# EAGLE board Mk4 Prototype (EAGLE 9.0.1), part 1 of 3
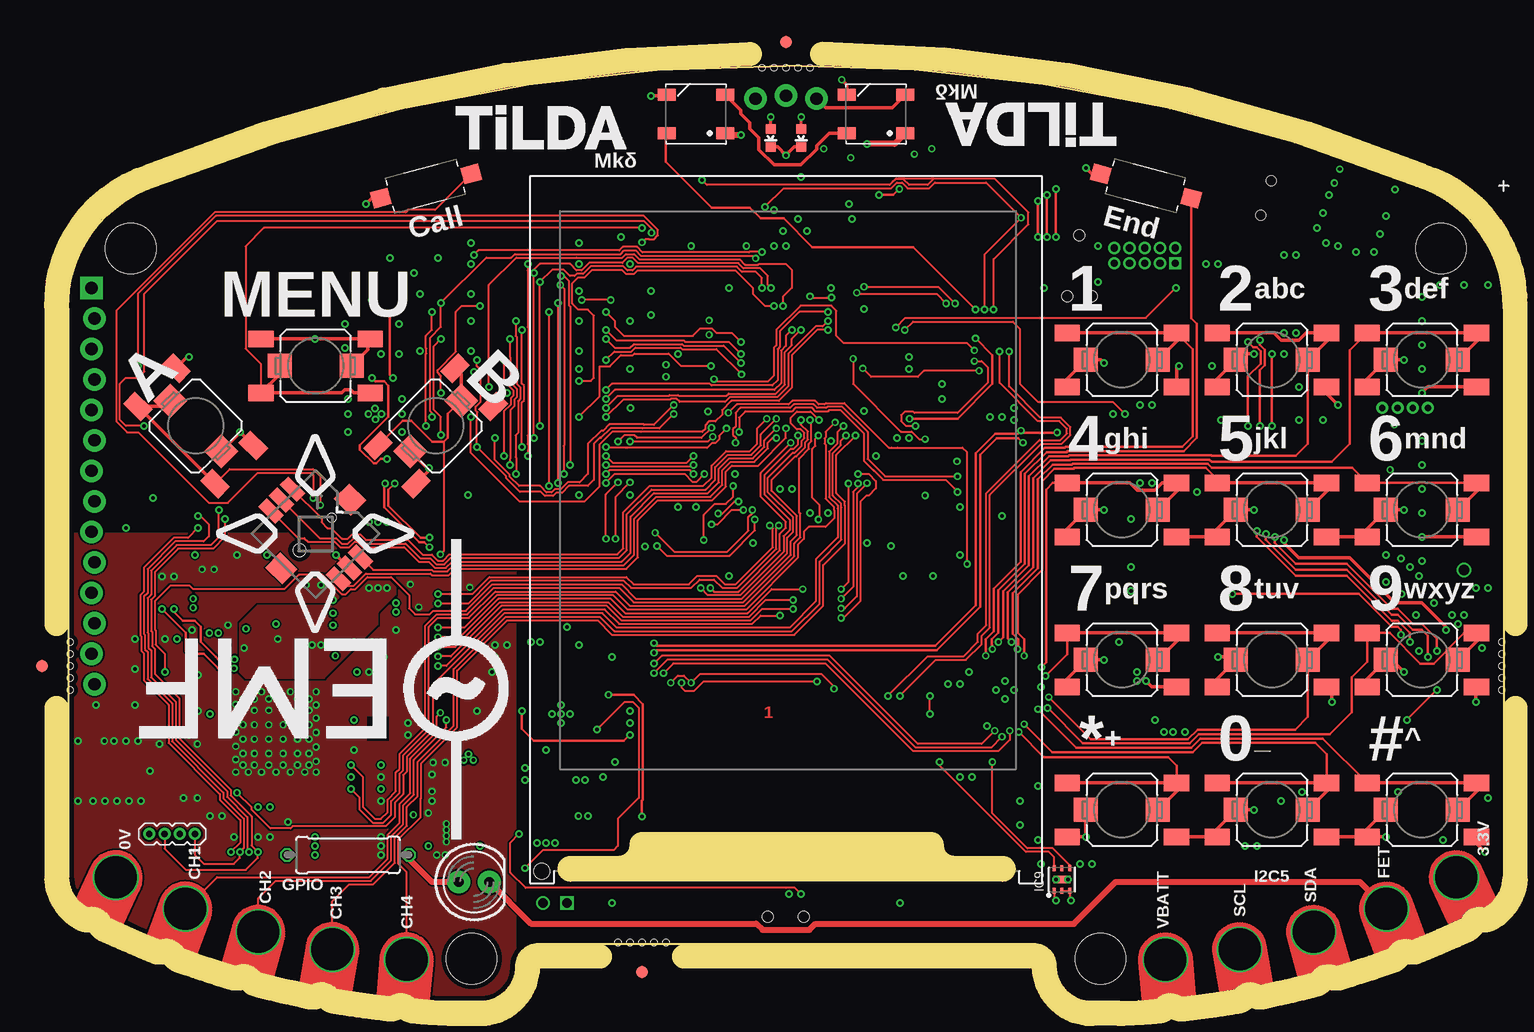
[diagram p0: board, top side]
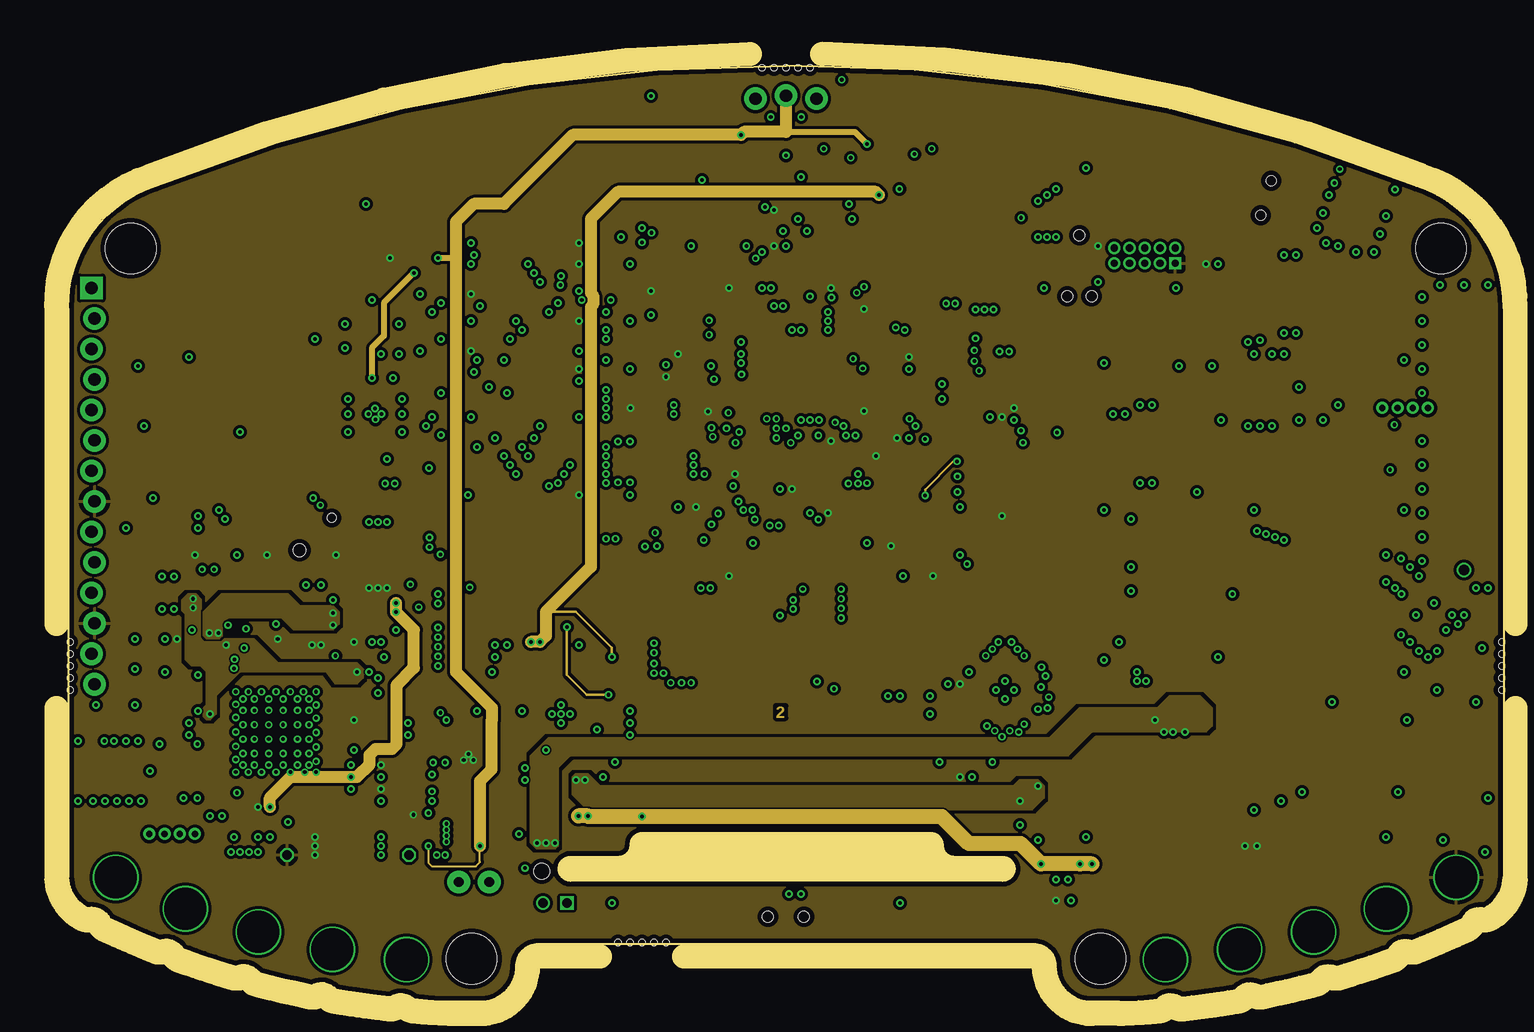
[diagram p1: board, inner layer 3V3@2]
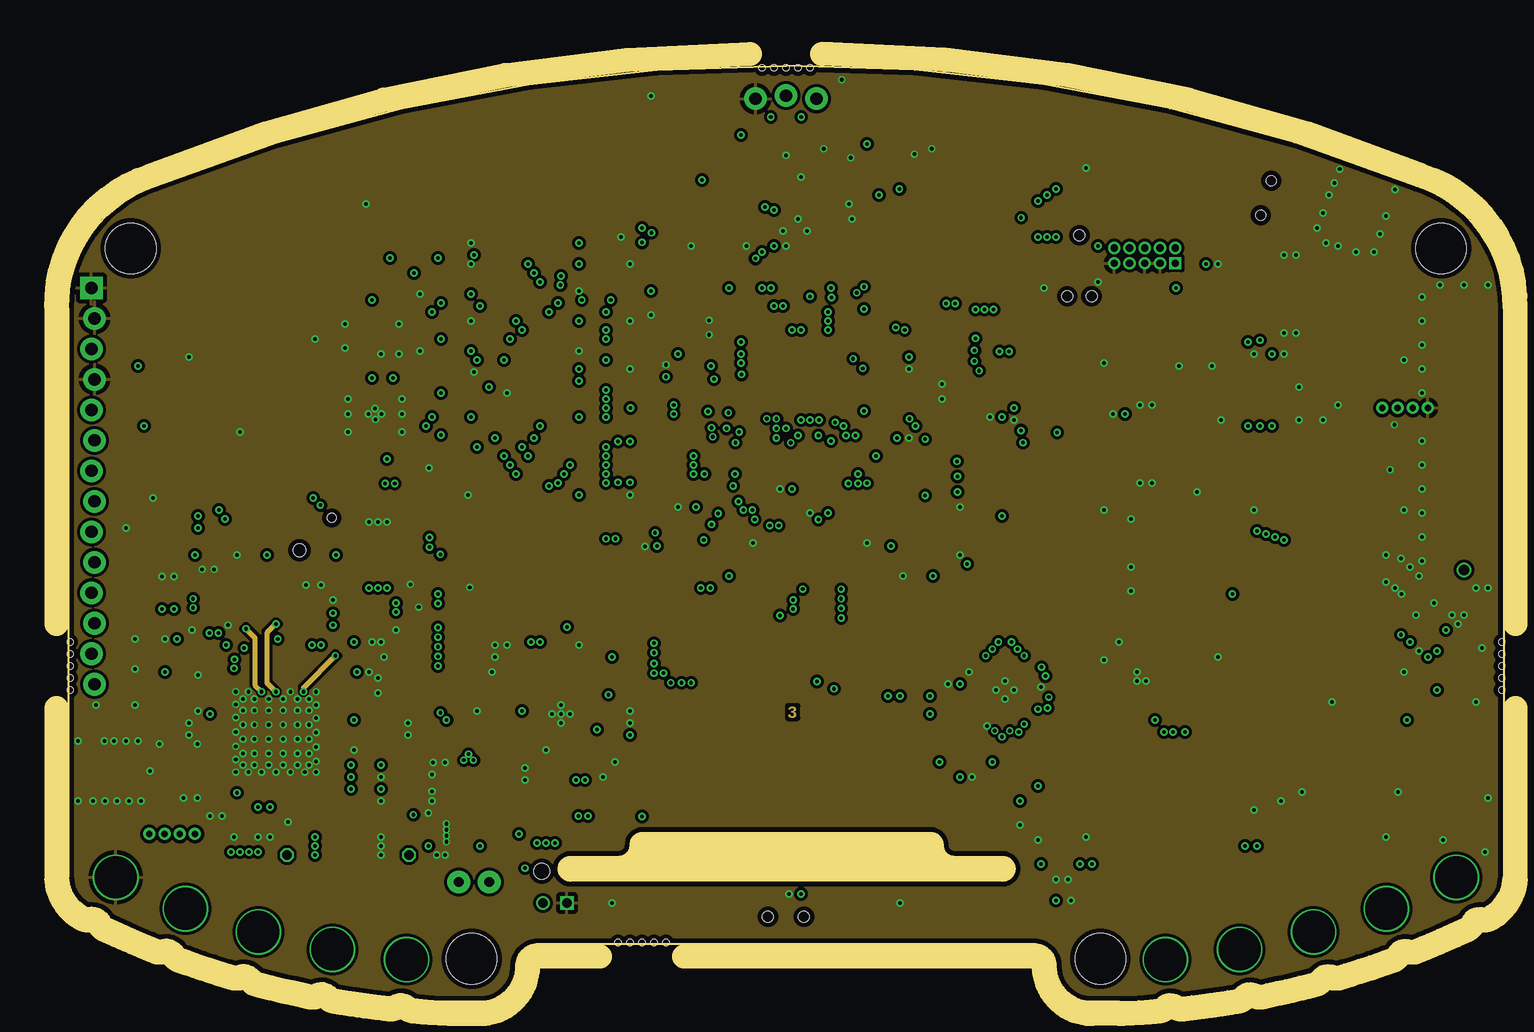
[diagram p2: board, inner layer GND@3]
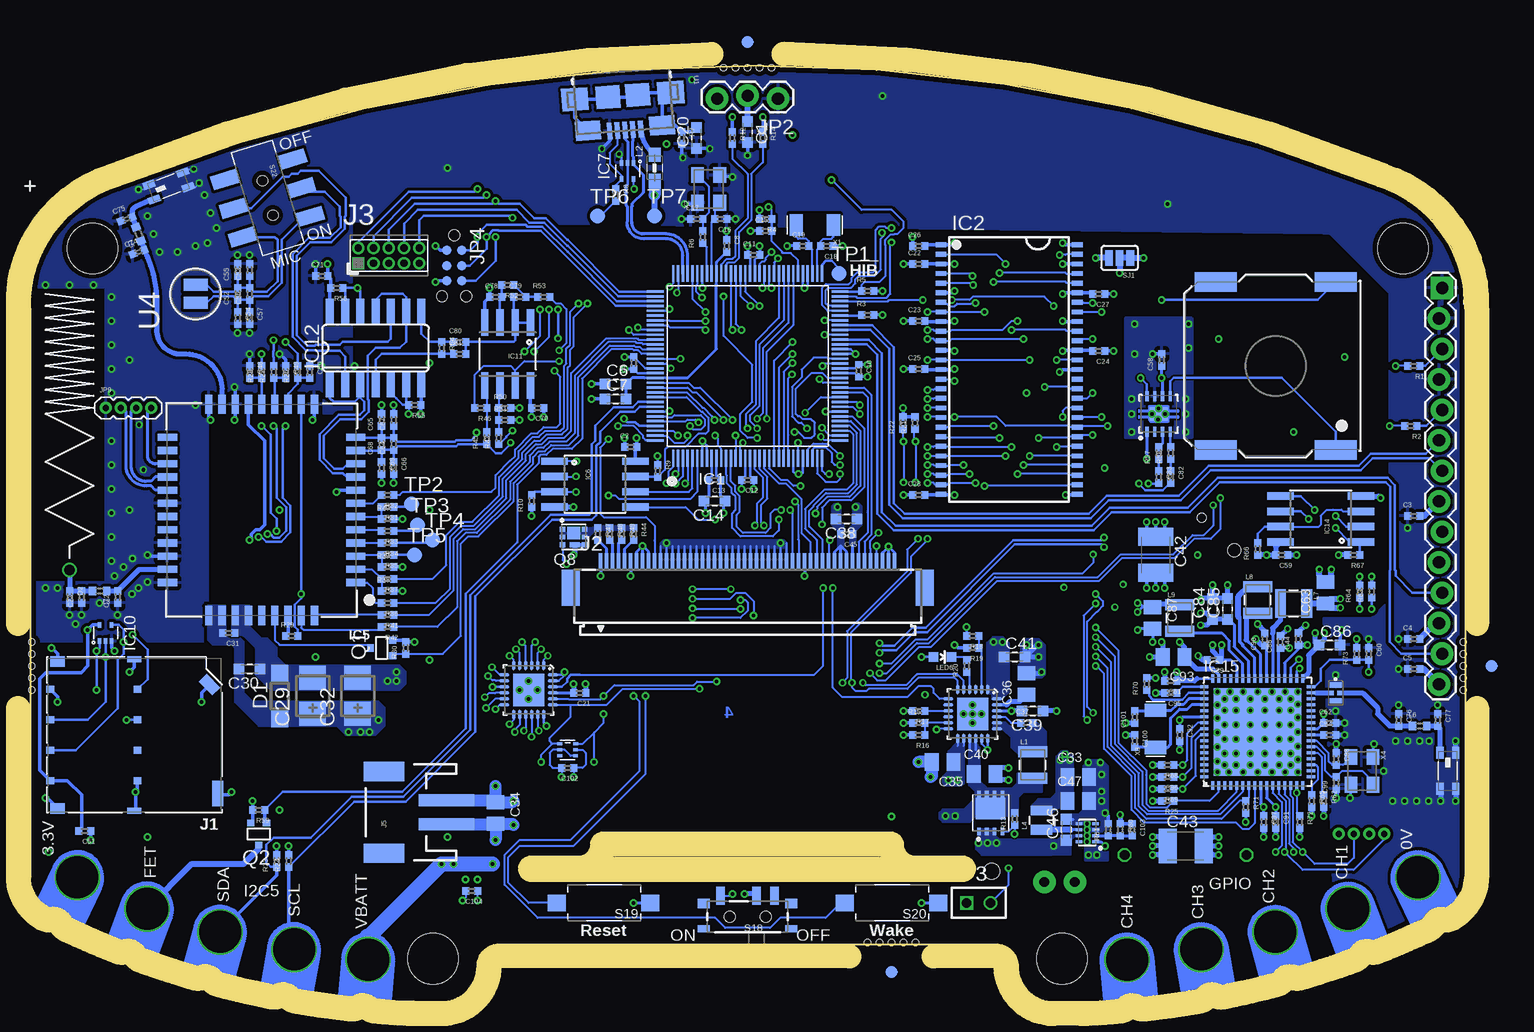
[diagram p3: board, bottom side, seen from below]

Size 119.6 x 78 mm. Coordinates in mm from the lower left corner, seen from the top.
Copper layers (1+2*15+16): Top 0.035mm / dielectric 0.22mm / 3V3@2 0.017mm / dielectric 1mm / GND@3 0.017mm / dielectric 0.22mm / Bottom 0.035mm
Design rules "little015mm  Round 4layer Newbury *": minimum track width 0.15mm, minimum drill 0.3mm, track to track 0.15mm, track to pad 0.15mm, pad to pad 0.15mm, via to via 0.15mm, smd to smd 0.15mm, copper to edge 0.4mm, drill to drill 0.3mm, minimum pad ring 0.15mm, minimum via ring 0.15mm, stop-mask expansion 0.1mm, vias tented up to drill 0.6mm, thermal gap 14mil
Net classes: 1 50R Single: width 0.4 mm, clearance 0.4 mm to class 0, clearance 0.4 mm; 2 90R Diff: width 0.25 mm, clearance 0.25 mm to class 0, clearance 0.4 mm to class 1, clearance 0.15 mm; 3 100R Diff: width 0.22 mm, clearance 0.25 mm to class 0, clearance 0.4 mm to class 1, clearance 0.25 mm to class 2, clearance 0.15 mm; 4 Audio: width 0.2 mm, clearance 0.25 mm to class 0, clearance 0.4 mm to class 1, clearance 0.25 mm to class 2, clearance 0.25 mm to class 3, clearance 0.15 mm
bRestrict: area 10.9,29.4 to 11.5,30.1

## Footprints (pad centres in the part's own frame; a part is rotated, then mirrored left to right if it is on the bottom)
2450AT18D0100 = smd 1 x 0.6: 1 -1.5,-0.65; 2 1.5,-0.65; 3 1.5,0.65; 4 -1.5,0.65
C0603K-SMALL = smd 0.889 x 0.889: 1 -0.875,0; 2 0.875,0
C0402-SMALLER = smd 0.6 x 0.6: 1 -0.5,0; 2 0.5,0
CT3528 = smd 2 x 2.2: + -1.5,0; - 1.5,0
C0805-N = smd 1.15 x 1.45: 1 -0.9,0; 2 0.9,0
C1210K = smd 1.5 x 2.9: 1 -1.5,0; 2 1.5,0
SOD123 = smd 1.4 x 1.4: A 1.9,0; C -1.9,0
R0402-SMALLER = smd 0.6 x 0.6: 1 -0.5,0; 2 0.5,0
FIDUCIAL-1X2.5-STOP = smd 1 x 1: 1 0,0
DEA202450BT = smd 0.45 x 1: GND@2 0.65,0; GND@4 -0.65,0 | smd 0.35 x 0.35: IN 0,-0.325; OUT 0,0.325
QFP128-0.4 = smd 0.2 x 1.4: 1 -6.2,-7.7; 2 -5.8,-7.7; 3 -5.4,-7.7; 4 -5,-7.7; 5 -4.6,-7.7; 6 -4.2,-7.7; 7 -3.8,-7.7; 8 -3.4,-7.7; 9 -3,-7.7; 10 -2.6,-7.7; 11 -2.2,-7.7; 12 -1.8,-7.7; 13 -1.4,-7.7; 14 -1,-7.7; 15 -0.6,-7.7; 16 -0.2,-7.7; 17 0.2,-7.7; 18 0.6,-7.7; 19 1,-7.7; 20 1.4,-7.7; 21 1.8,-7.7; 22 2.2,-7.7; 23 2.6,-7.7; 24 3,-7.7; 25 3.4,-7.7; 26 3.8,-7.7; 27 4.2,-7.7; 28 4.6,-7.7; 29 5,-7.7; 30 5.4,-7.7; 31 5.8,-7.7; 32 6.2,-7.7; 65 6.2,7.7; 66 5.8,7.7; 67 5.4,7.7; 68 5,7.7; 69 4.6,7.7; 70 4.2,7.7; 71 3.8,7.7; 72 3.4,7.7; 73 3,7.7; 74 2.6,7.7; 75 2.2,7.7; 76 1.8,7.7; 77 1.4,7.7; 78 1,7.7; 79 0.6,7.7; 80 0.2,7.7; 81 -0.2,7.7; 82 -0.6,7.7; 83 -1,7.7; 84 -1.4,7.7; 85 -1.8,7.7; 86 -2.2,7.7; 87 -2.6,7.7; 88 -3,7.7; 89 -3.4,7.7; 90 -3.8,7.7; 91 -4.2,7.7; 92 -4.6,7.7; 93 -5,7.7; 94 -5.4,7.7; 95 -5.8,7.7; 96 -6.2,7.7 | smd 1.4 x 0.2: 33 7.7,-6.2; 34 7.7,-5.8; 35 7.7,-5.4; 36 7.7,-5; 37 7.7,-4.6; 38 7.7,-4.2; 39 7.7,-3.8; 40 7.7,-3.4; 41 7.7,-3; 42 7.7,-2.6; 43 7.7,-2.2; 44 7.7,-1.8; 45 7.7,-1.4; 46 7.7,-1; 47 7.7,-0.6; 48 7.7,-0.2; 49 7.7,0.2; 50 7.7,0.6; 51 7.7,1; 52 7.7,1.4; 53 7.7,1.8; 54 7.7,2.2; 55 7.7,2.6; 56 7.7,3; 57 7.7,3.4; 58 7.7,3.8; 59 7.7,4.2; 60 7.7,4.6; 61 7.7,5; 62 7.7,5.4; 63 7.7,5.8; 64 7.7,6.2; 97 -7.7,6.2; 98 -7.7,5.8; 99 -7.7,5.4; 100 -7.7,5; 101 -7.7,4.6; 102 -7.7,4.2; 103 -7.7,3.8; 104 -7.7,3.4; 105 -7.7,3; 106 -7.7,2.6; 107 -7.7,2.2; 108 -7.7,1.8; 109 -7.7,1.4; 110 -7.7,1; 111 -7.7,0.6; 112 -7.7,0.2; 113 -7.7,-0.2; 114 -7.7,-0.6; 115 -7.7,-1; 116 -7.7,-1.4; 117 -7.7,-1.8; 118 -7.7,-2.2; 119 -7.7,-2.6; 120 -7.7,-3; 121 -7.7,-3.4; 122 -7.7,-3.8; 123 -7.7,-4.2; 124 -7.7,-4.6; 125 -7.7,-5; 126 -7.7,-5.4; 127 -7.7,-5.8; 128 -7.7,-6.2
TSOP54-400 = smd 0.4 x 0.9: 1 -10.4,-5.68; 2 -9.6,-5.68; 3 -8.8,-5.68; 4 -8,-5.68; 5 -7.2,-5.68; 6 -6.4,-5.68; 7 -5.6,-5.68; 8 -4.8,-5.68; 9 -4,-5.68; 10 -3.2,-5.68; 11 -2.4,-5.68; 12 -1.6,-5.68; 13 -0.8,-5.68; 14 0,-5.68; 15 0.8,-5.68; 16 1.6,-5.68; 17 2.4,-5.68; 18 3.2,-5.68; 19 4,-5.68; 20 4.8,-5.68; 21 5.6,-5.68; 22 6.4,-5.68; 23 7.2,-5.68; 24 8,-5.68; 25 8.8,-5.68; 26 9.6,-5.68; 27 10.4,-5.68; 28 10.4,5.68; 29 9.6,5.68; 30 8.8,5.68; 31 8,5.68; 32 7.2,5.68; 33 6.4,5.68; 34 5.6,5.68; 35 4.8,5.68; 36 4,5.68; 37 3.2,5.68; 38 2.4,5.68; 39 1.6,5.68; 40 0.8,5.68; 41 0,5.68; 42 -0.8,5.68; 43 -1.6,5.68; 44 -2.4,5.68; 45 -3.2,5.68; 46 -4,5.68; 47 -4.8,5.68; 48 -5.6,5.68; 49 -6.4,5.68; 50 -7.2,5.68; 51 -8,5.68; 52 -8.8,5.68; 53 -9.6,5.68; 54 -10.4,5.68
VSON-HR = smd 0.55 x 0.25: 1 -0.675,0.75; 2 -0.675,0.25; 3 -0.675,-0.25; 4 -0.675,-0.75; 5 0.675,-0.75; 6 0.675,-0.25; 7 0.675,0.25; 8 0.675,0.75
QFN-24 = smd 0.85 x 0.25: 1 -2.05,1.25; 2 -2.05,0.75; 3 -2.05,0.25; 4 -2.05,-0.25; 5 -2.05,-0.75; 6 -2.05,-1.25; 13 2.05,-1.25; 14 2.05,-0.75; 15 2.05,-0.25; 16 2.05,0.25; 17 2.05,0.75; 18 2.05,1.25 | smd 0.25 x 0.9: 7 -1.25,-2.025; 8 -0.75,-2.025; 9 -0.25,-2.025; 10 0.25,-2.025; 11 0.75,-2.025; 12 1.25,-2.025; 19 1.25,2.025; 20 0.75,2.025; 21 0.25,2.025; 22 -0.25,2.025; 23 -0.75,2.025; 24 -1.25,2.025 | smd 2.7 x 2.6: 25 0,0
SIM800C = smd 1.6 x 0.6: 1 -7.85,6.05; 2 -7.85,4.95; 3 -7.85,3.85; 4 -7.85,2.75; 5 -7.85,1.65; 6 -7.85,0.55; 7 -7.85,-0.55; 8 -7.85,-1.65; 9 -7.85,-2.75; 10 -7.85,-3.85; 11 -7.85,-4.95; 12 -7.85,-6.05; 22 7.85,-6.05; 23 7.85,-4.95; 24 7.85,-3.85; 25 7.85,-2.75; 26 7.85,-1.65; 27 7.85,-0.55; 28 7.85,0.55; 29 7.85,1.65; 30 7.85,2.75; 31 7.85,3.85; 32 7.85,4.95; 33 7.85,6.05 | smd 0.6 x 1.6: 13 -4.4,-8.8; 14 -3.3,-8.8; 15 -2.2,-8.8; 16 -1.1,-8.8; 17 0,-8.8; 18 1.1,-8.8; 19 2.2,-8.8; 20 3.3,-8.8; 21 4.4,-8.8; 34 4.4,8.8; 35 3.3,8.8; 36 2.2,8.8; 37 1.1,8.8; 38 0,8.8; 39 -1.1,8.8; 40 -2.2,8.8; 41 -3.3,8.8; 42 -4.4,8.8
SO08-EIAJ = smd 0.61 x 2.21: 1 -1.905,-3.378; 2 -0.635,-3.378; 3 0.635,-3.378; 4 1.905,-3.378; 5 1.905,3.353; 6 0.635,3.353; 7 -0.635,3.353; 8 -1.905,3.353
DRL-5 = smd 0.3 x 0.45: 1 -0.5,-0.675; 2 0,-0.675; 3 0.5,-0.675; 4 0.5,0.675; 5 -0.5,0.675
USON-6 = smd 0.5 x 0.25: 1 -0.95,0.65; 2 -0.95,0; 3 -0.95,-0.65; 4 0.95,-0.65; 5 0.95,0; 6 0.95,0.65 | smd 0.65 x 1.35: PAD 0,0
SO08 = smd 0.61 x 2.21: 1 -1.905,-2.616; 2 -0.635,-2.616; 3 0.635,-2.616; 4 1.905,-2.616; 5 1.905,2.616; 6 0.635,2.616; 7 -0.635,2.616; 8 -1.905,2.616
SO14 = smd 0.66 x 2.032: 1 -3.81,-3.073; 2 -2.54,-3.073; 3 -1.27,-3.073; 4 0,-3.073; 5 1.27,-3.073; 6 2.54,-3.073; 7 3.81,-3.073; 8 3.81,3.073; 9 2.54,3.073; 10 1.27,3.073; 11 0,3.073; 12 -1.27,3.073; 13 -2.54,3.073; 14 -3.81,3.073
VSON-8 = smd 0.85 x 0.28: 1 -1.475,0.975; 2 -1.475,0.325; 3 -1.475,-0.325; 4 -1.475,-0.975; 5 1.475,-0.975; 6 1.475,-0.325; 7 1.475,0.325; 8 1.475,0.975 | smd 1.15 x 1.5: PAD 0,0
VQFN-64 = smd 0.25 x 0.7: 1 -3.75,-4.45; 2 -3.25,-4.45; 3 -2.75,-4.45; 4 -2.25,-4.45; 5 -1.75,-4.45; 6 -1.25,-4.45; 7 -0.75,-4.45; 8 -0.25,-4.45; 9 0.25,-4.45; 10 0.75,-4.45; 11 1.25,-4.45; 12 1.75,-4.45; 13 2.25,-4.45; 14 2.75,-4.45; 15 3.25,-4.45; 16 3.75,-4.45; 33 3.75,4.45; 34 3.25,4.45; 35 2.75,4.45; 36 2.25,4.45; 37 1.75,4.45; 38 1.25,4.45; 39 0.75,4.45; 40 0.25,4.45; 41 -0.25,4.45; 42 -0.75,4.45; 43 -1.25,4.45; 44 -1.75,4.45; 45 -2.25,4.45; 46 -2.75,4.45; 47 -3.25,4.45; 48 -3.75,4.45 | smd 0.7 x 0.25: 17 4.45,-3.75; 18 4.45,-3.25; 19 4.45,-2.75; 20 4.45,-2.25; 21 4.45,-1.75; 22 4.45,-1.25; 23 4.45,-0.75; 24 4.45,-0.25; 25 4.45,0.25; 26 4.45,0.75; 27 4.45,1.25; 28 4.45,1.75; 29 4.45,2.25; 30 4.45,2.75; 31 4.45,3.25; 32 4.45,3.75; 49 -4.45,3.75; 50 -4.45,3.25; 51 -4.45,2.75; 52 -4.45,2.25; 53 -4.45,1.75; 54 -4.45,1.25; 55 -4.45,0.75; 56 -4.45,0.25; 57 -4.45,-0.25; 58 -4.45,-0.75; 59 -4.45,-1.25; 60 -4.45,-1.75; 61 -4.45,-2.25; 62 -4.45,-2.75; 63 -4.45,-3.25; 64 -4.45,-3.75 | smd 7.3 x 7.3: PAD 0,0
MSIM-MOLEX-LWK = smd 0.65 x 0.55: C1 0.61,3.81; C2 0.61,1.27; C3 0.61,-1.27; C4 0.61,-3.81; C5 -6.65,3.81; C6 -6.65,1.27; C7 -6.65,-1.27; C8 -6.65,-3.81 | smd 1.2 x 0.89: GND1 0,6.125; GND2 0,-6.125 | smd 1.6 x 0.94 rotated 315: GND3 -12.67,-4.19 | smd 1.2 x 0.52: GND4 -6.39,6.31; GND5 -6.39,-6.31 | smd 0.94 x 2.1: GND6 -13.35,4.88
FH12-50S-0.5SH = smd 0.3 x 1.3: 1 -12.25,3.25; 2 -11.75,3.25; 3 -11.25,3.25; 4 -10.75,3.25; 5 -10.25,3.25; 6 -9.75,3.25; 7 -9.25,3.25; 8 -8.75,3.25; 9 -8.25,3.25; 10 -7.75,3.25; 11 -7.25,3.25; 12 -6.75,3.25; 13 -6.25,3.25; 14 -5.75,3.25; 15 -5.25,3.25; 16 -4.75,3.25; 17 -4.25,3.25; 18 -3.75,3.25; 19 -3.25,3.25; 20 -2.75,3.25; 21 -2.25,3.25; 22 -1.75,3.25; 23 -1.25,3.25; 24 -0.75,3.25; 25 -0.25,3.25; 26 0.25,3.25; 27 0.75,3.25; 28 1.25,3.25; 29 1.75,3.25; 30 2.25,3.25; 31 2.75,3.25; 32 3.25,3.25; 33 3.75,3.25; 34 4.25,3.25; 35 4.75,3.25; 36 5.25,3.25; 37 5.75,3.25; 38 6.25,3.25; 39 6.75,3.25; 40 7.25,3.25; 41 7.75,3.25; 42 8.25,3.25; 43 8.75,3.25; 44 9.25,3.25; 45 9.75,3.25; 46 10.25,3.25; 47 10.75,3.25; 48 11.25,3.25; 49 11.75,3.25; 50 12.25,3.25 | smd 1.5 x 3: 51 -14.75,1; 52 14.75,1
PINHEAD_2X05_127 = drill 0.6 pad 1.016 square: 1 -2.54,-0.635 | drill 0.6 pad 1.016: 2 -2.54,0.635; 3 -1.27,-0.635; 4 -1.27,0.635; 5 0,-0.635; 6 0,0.635; 7 1.27,-0.635; 8 1.27,0.635; 9 2.54,-0.635; 10 2.54,0.635
GSM-ANTENNA = drill 0.9: ANT 0,0
JST-2-SMD = smd 1 x 4.6: 1 -1,-3.7; 2 1,-3.7 | smd 1.6 x 3.4: NC1 -3.4,1.5; NC2 3.4,1.5
1X03_LOCK = drill 1.016 pad 1.88: 1 0,0.127; 2 2.54,-0.127; 3 5.08,0.127
1X02_2MM = drill 0.8 square: 1 0,0 | drill 0.8: 2 2,0
TC2030-MCP-NL = smd 0.787 x 0.787: 1 1.27,-0.635; 2 1.27,0.635; 3 2.54,-0.635; 4 2.54,0.635; 5 3.81,-0.635; 6 3.81,0.635 | hole 0.889: 0,0; 5.08,-1.016; 5.08,1.016
1X14_LOCK = drill 1.016 pad 1.88 square: 1 0,0.127 | drill 1.016 pad 1.88: 2 2.54,-0.127; 3 5.08,0.127; 4 7.62,-0.127; 5 10.16,0.127; 6 12.7,-0.127; 7 15.24,0.127; 8 17.78,-0.127; 9 20.32,0.127; 10 22.86,-0.127; 11 25.4,0.127; 12 27.94,-0.127; 13 30.48,0.127; 14 33.02,-0.127
1X04-1.27MM = drill 0.508 pad 1: 1 0,0; 2 1.27,0; 3 2.54,0; 4 3.81,0
1008 = smd 0.9 x 2.4: 1 -1.1,0; 2 1.1,0
WUERTH-0805 = smd 1.2 x 1: 1 -1.1,0; 2 1.1,0
L0402 = smd 0.6 x 0.7: 1 -0.6,0; 2 0.6,0
0806 = smd 0.8 x 1.8: 1 -0.8,0; 2 0.8,0
ER-TFT024-3 = hole 1.3: -20.35,-22.6
WS2812B = smd 1.5 x 1: 1 -2.45,1.6; 2 -2.45,-1.6; 3 2.45,-1.6; 4 2.45,1.6
LED-0603-CORRECT = smd 0.8 x 0.8: A 0.75,0; C -0.75,0
LED5MM = drill 0.813 pad 1.88: A -1.27,0; K 1.27,0
TILDA_MK4_OUTLINE = drill 3.5: 3V3 55.856,10.386; CH1 -31.617,3.538; CH2 -37.798,4.386; CH3 -43.962,5.833; CH4 -50.042,7.771; FET 50.042,7.771; GND -55.856,10.386; SCL 37.798,4.386; SDA 43.962,5.833; VBATT 31.617,3.538 | hole 4.2: 26.2,3.6; -26.2,3.6; 54.6,62.8; -54.6,62.8 | hole 0.5: 59.65,30; 59.65,29; 59.65,28; 59.65,27; 59.65,26; -10,4.95; -11,4.95; -12,4.95; -13,4.95; -14,4.95; -59.65,26; -59.65,27; -59.65,28; -59.65,29; -59.65,30; -2,77.85; -1,77.85; 0,77.85; 1,77.85; 2,77.85
SC70-3-R = smd 0.6 x 0.55: 1 -0.65,-0.925; 2 0.65,-0.925; 3 0,0.925
Q3A = smd 0.3 x 0.6: 1 -0.975,-1.55; 2 -0.325,-1.55; 3 0.325,-1.55; 4 0.975,-1.55; 5 0.975,1.55; 6 0.325,1.55; 7 -0.325,1.55; 8 -0.975,1.55 | smd 2.45 x 1.775: EP 0,0.375
Q2 = smd 0.4 x 0.455: 1 -0.65,-0.922; 2 0,-0.922; 3 0.65,-0.922; 4 0.65,0.922; 5 0,0.922; 6 -0.65,0.922 | smd 1.05 x 1.1: EP1 -0.325,0 | smd 0.4 x 0.85: EP2 0.65,0.1
0309/10 = drill 0.813 octagon: 1 -5.08,0; 2 5.08,0
SKPMAPE010-COMBINED = smd 2 x 2: 1 -3,0; 2 3,0 | smd 2.1 x 1.4: A1 -4.55,-2.25; A2 4.55,-2.25; B1 -4.55,2.25; B2 4.55,2.25
TACTILE_SWITCH_SMD_3X6X2.5H = smd 1.5 x 1.4: 1 -3.9,0; 2 3.9,0
SWITCH-SPST-SMD-A = smd 0.7 x 1.5: 1 -2.25,-1.75; 2 -0.75,-1.75; 3 2.25,-1.75 | smd 1 x 0.6: GND1 -3.65,1; GND3 3.65,1 | smd 1 x 0.8: GND2 -3.65,-1.1; GND4 3.65,-1.1 | hole 0.9: -1.5,0; 1.5,0
AYZ-JS-COMBINED = smd 1.2 x 2.2: 1 -2.5,2.975; 2 0,2.975; 3 2.5,2.975; 4 -2.5,-2.975; 5 0,-2.975; 6 2.5,-2.975 | hole 0.85: 1.5,0; -1.5,0
SJ_3 = smd 0.635 x 1.27: 1 -0.889,0; 2 0,0; 3 0.889,0
JOYSTICK_MULTICOMP_NOSILK = smd 2 x 1: A -4,1.275; B 4,1.275; C -4,-1.275; COM 4,0; CTR -4,0; D 4,-1.275 | smd 2 x 1.8: NC 0,4.05; NC@0 0,-4.05 | hole 0.75: 0,1.9 | hole 1.05: 0,-1.9
B1,27 = smd 1.27 x 1.27: TP 0,0
USB-AB-MICRO-SMD_LWK = smd 1.4 x 0.4: D+ 2.85,0; D- 2.85,0.65; GND 2.85,-1.3; ID 2.85,-0.65; VBUS 2.85,1.3 | smd 1.6 x 2.1: SHIELD 2.675,3.1; SHIELD@5 2.675,-3.1 | smd 1.9 x 2: SHIELD@0 0,1.25; SHIELD@1 0,-1.25 | smd 1.9 x 2.2: SHIELD@2 0,-4; SHIELD@3 0,4
SOT563 = smd 0.25 x 0.4: 1 -0.5,-0.66; 2 0,-0.66; 3 0.5,-0.66; 4 0.5,0.66; 5 0,0.66; 6 -0.5,0.67
MIC-SMD-4MM = smd 1 x 2: + -0.75,0; - 0.75,0
SPEAKER-15MM-SMD = smd 1.6 x 3.5: + -7,-5; - 7,-5; DUMMY@3 7,5; DUMMY@4 -7,5
RESONATOR_EPSON_FC_145 = smd 1.1 x 1.8: P$1 -1.55,0; P$2 1.55,0
CRYSTAL-3.2-2.5 = smd 1.3 x 1.05: 1 -1.15,-0.925; 2 1.15,-0.925; 3 1.15,0.925; 4 -1.15,0.925

## Placement (x,y rotation side)
ANT1  2450AT18D0100  [2450AT18D0100]  1.45,19.25 270 bottom
ANT2  2450AT18D0100  [2450AT18D0100]  108.05,68 20 bottom
ARTWORK1  ARTWORK_JOYSTICK  [TILDA_ARTWORK_JOYSTICK]  20.6,39 0 top
ARTWORK2  ARTWORK_KEYPAD  [TILDA_ARTWORK_KEYPAD]  59.8,0 0 top
BATT  1000mAh JST-PH  [BATTERY-32X50]  59.3,12 90 top
C1  0603/1u/6V3/X5R  [C0603K-SMALL]  59.8,72.5 270 bottom
C2  0402/100n/10V/X5R  [C0402-SMALLER]  69.55,46.25 0 bottom
C3  0402/100n/10V/X5R  [C0402-SMALLER]  4.3,40.5 0 bottom
C4  0402/100n/10V/X5R  [C0402-SMALLER]  4.3,30.25 0 bottom
C5  0402/100n/10V/X5R  [C0402-SMALLER]  4.3,27.75 0 bottom
C6  0603/2u2/6V3/X5R  [C0603K-SMALL]  70.8,51.5 0 bottom
C7  0603/1u/6V3/X5R  [C0603K-SMALL]  70.8,50.25 0 bottom
C8  0402/100n/10V/X5R  [C0402-SMALLER]  61.55,63 270 bottom
C9  0402/100n/10V/X5R  [C0402-SMALLER]  69.3,53.25 90 bottom
C10  0402/100n/10V/X5R  [C0402-SMALLER]  50.55,52.6 270 bottom
C11  0402/100n/10V/X5R  [C0402-SMALLER]  59.3,62.25 0 bottom
C12  0402/100n/10V/X5R  [C0402-SMALLER]  59.8,43.5 180 bottom
C13  0402/100n/10V/X5R  [C0402-SMALLER]  62.55,43.5 180 bottom
C14  0603/1u/6V3/X5R  [C0603K-SMALL]  62.55,41.75 180 bottom
C15  0402/100n/10V/X5R  [C0402-SMALLER]  58.3,64.25 0 bottom
C16  0402/12p/50V/C0G  [C0402-SMALLER]  62.05,65.25 180 bottom
C17  0402/12p/50V/C0G  [C0402-SMALLER]  64.05,65.25 0 bottom
C18  0402/12p/50V/C0G  [C0402-SMALLER]  53.2,63 180 bottom
C19  0402/12p/50V/C0G  [C0402-SMALLER]  55.2,63 0 bottom
C20  0603/3n3/50V/X7R  [C0603K-SMALL]  64.05,72 90 bottom
C21  0402/100n/10V/X5R  [C0402-SMALLER]  73.8,25.75 180 bottom
C22  0402/100n/10V/X5R  [C0402-SMALLER]  45.55,61.5 0 bottom
C23  0402/100n/10V/X5R  [C0402-SMALLER]  45.55,56.75 0 bottom
C24  0402/100n/10V/X5R  [C0402-SMALLER]  30.55,54.25 180 bottom
C25  0402/100n/10V/X5R  [C0402-SMALLER]  45.55,52.75 0 bottom
C26  0402/100n/10V/X5R  [C0402-SMALLER]  45.55,63 0 bottom
C27  0402/100n/10V/X5R  [C0402-SMALLER]  30.55,59 180 bottom
C28  0402/100n/10V/X5R  [C0402-SMALLER]  45.55,42.25 0 bottom
C29  1411/100u/10V/Tant  [CT3528]  96.05,25.5 90 bottom
C30  0603/4u7/10V/X5R  [C0603K-SMALL]  101.3,27.75 180 bottom
C31  0402/100n/10V/X5R  [C0402-SMALLER]  103.05,30.75 180 bottom
C32  1411/100u/10V/Tant  [CT3528]  92.3,25.5 90 bottom
C33  0805/10u/10V/X5R  [C0805-N]  32.25,18.75 0 bottom
C34  0805/10u/10V/X5R  [C0805-N]  80.8,15.75 270 bottom
C35  0805/10u/10V/X5R  [C0805-N]  43.55,20 180 bottom
C36  0805/10u/10V/X5R  [C0805-N]  36.55,26.5 90 bottom
C37  0402/47n/10V/X5R  [C0402-SMALLER]  36.55,23.25 0 bottom
C38  0603/4u7/10V/X5R  [C0603K-SMALL]  51.55,40.25 180 bottom
C39  0603/4u7/10V/X5R  [C0603K-SMALL]  36.05,24.25 180 bottom
C40  0805/10u/10V/X5R  [C0805-N]  40.05,19 0 bottom
C41  0603/1u/6V3/X5R  [C0603K-SMALL]  37.55,28.75 0 bottom
C42  1210/100u/6V3/X5R  [C1210K]  25.8,37.25 270 bottom
C43  1210/100u/6V3/X5R  [C1210K]  23.3,13 0 bottom
C44  0402/100n/10V/X5R  [C0402-SMALLER]  13.9,30.25 90 bottom
C45  0402/100n/10V/X5R  [C0402-SMALLER]  51.55,39 180 bottom
C46  0603/4u7/10V/X5R  [C0603K-SMALL]  33.25,14.35 90 bottom
C47  0805/10u/10V/X5R  [C0805-N]  32.25,16.75 0 bottom
C48  0402/22p/10V/C0G  [C0402-SMALLER]  101.3,52.5 270 bottom
C49  0402/22p/10V/C0G  [C0402-SMALLER]  98.3,52.5 270 bottom
C50  0402/22p/10V/C0G  [C0402-SMALLER]  96.3,52.5 270 bottom
C51  0402/100n/10V/X5R  [C0402-SMALLER]  115.05,14.25 180 bottom
C52  0402/33p/50V/C0G  [C0402-SMALLER]  102.3,59 90 bottom
C53  0402/10p/50V/C0G  [C0402-SMALLER]  101.3,61 90 bottom
C54  0402/33p/50V/C0G  [C0402-SMALLER]  102.3,57 270 bottom
C55  0402/33p/50V/C0G  [C0402-SMALLER]  102.3,61 90 bottom
C56  0402/10p/50V/C0G  [C0402-SMALLER]  101.3,59 90 bottom
C57  0402/10p/50V/C0G  [C0402-SMALLER]  101.3,57 270 bottom
C58  0402/100n/10V/X5R  [C0402-SMALLER]  25.3,53.5 90 bottom
C59  0402/100n/10V/X5R  [C0402-SMALLER]  15.3,37.25 180 bottom
C60  0402/100n/10V/X5R  [C0402-SMALLER]  8.05,29 270 bottom
C61  0402/100n/10V/X5R  [C0402-SMALLER]  24.55,26.75 180 bottom
C62  0402/100n/10V/X5R  [C0402-SMALLER]  11.3,23.25 0 bottom
C63  0805/10u/10V/X5R  [C0805-N]  11.65,34.1 90 bottom
C64  0402/33p/50V/C0G  [C0402-SMALLER]  89.3,46.5 90 bottom
C65  0402/10p/50V/C0G  [C0402-SMALLER]  90.3,48.5 90 bottom
C66  0402/33p/50V/C0G  [C0402-SMALLER]  89.3,44.5 270 bottom
C67  0402/33p/50V/C0G  [C0402-SMALLER]  89.3,48.5 90 bottom
C68  0402/10p/50V/C0G  [C0402-SMALLER]  90.3,46.5 90 bottom
C69  0402/10p/50V/C0G  [C0402-SMALLER]  90.3,44.5 270 bottom
C70  0402/100n/10V/X5R  [C0402-SMALLER]  77.3,49.5 180 bottom
C71  0402/100n/10V/X5R  [C0402-SMALLER]  95.3,60.5 0 bottom
C72  [C0402-SMALLER]  112.3,33.75 90 bottom
C73  [C0402-SMALLER]  115.3,33.75 90 bottom
C74  [C0402-SMALLER]  110.55,62.5 20 bottom
C75  [C0402-SMALLER]  111.55,65.25 20 bottom
C76  [C0402-SMALLER]  5.55,23.5 270 bottom
C77  [C0402-SMALLER]  2.3,23.5 270 bottom
C78  0402/1n/10V/X5R  [C0402-SMALLER]  80.8,58.75 0 bottom
C79  0402/2n2/10V/X5R  [C0402-SMALLER]  78.8,58.75 0 bottom
C80  0402/100n/10V/X5R  [C0402-SMALLER]  83.8,55 0 bottom
C81  0402/100n/10V/X5R  [C0402-SMALLER]  83.8,54 0 bottom
C82  0402/220n/6V/X5R  [C0402-SMALLER]  24.55,43.75 270 bottom
C83  0402/220n/6V/X5R  [C0402-SMALLER]  25.55,43.75 270 bottom
C84  0603/22u/4V/X5R  [C0603K-SMALL]  21.05,32.75 90 bottom
C85  0603/22u/4V/X5R  [C0603K-SMALL]  19.8,32.75 90 bottom
C86  0603/1u/6V3/X5R  [C0603K-SMALL]  11.3,29.75 0 bottom
C87  0805/10u/10V/X5R  [C0805-N]  26.05,32 270 bottom
C88  0402/4u7/6V3/X5R  [C0402-SMALLER]  15.4,30 90 bottom
C89  0402/4u7/6V3/X5R  [C0402-SMALLER]  21,28.5 180 bottom
C90  0402/4u7/6V3/X5R  [C0402-SMALLER]  16.7,30.2 90 bottom
C91  0402/100n/10V/X5R  [C0402-SMALLER]  15.8,15 270 bottom
C92  0402/100n/10V/X5R  [C0402-SMALLER]  23.8,22.25 270 bottom
C93  0805/10u/10V/X5R  [C0805-N]  24.3,28.75 180 bottom
C94  0402/100n/10V/X5R  [C0402-SMALLER]  11.3,22.25 0 bottom
C95  0402/100n/10V/X5R  [C0402-SMALLER]  24.55,25.75 180 bottom
C96  0402/100n/10V/X5R  [C0402-SMALLER]  24.8,18.75 180 bottom
C97  0402/100n/10V/X5R  [C0402-SMALLER]  16.8,15 270 bottom
C98  0402/12p/50V/C0G  [C0402-SMALLER]  10.75,20.25 270 bottom
C99  0402/12p/50V/C0G  [C0402-SMALLER]  10.75,18.25 90 bottom
C100  0402/12p/50V/C0G  [C0402-SMALLER]  27.55,21.75 270 bottom
C101  0402/12p/50V/C0G  [C0402-SMALLER]  27.55,23.75 90 bottom
C102  0402/100n/10V/X5R  [C0402-SMALLER]  74.8,19.5 180 bottom
C103  0402/120p/50V/C0G  [C0402-SMALLER]  27.75,14.35 270 bottom
C104  0402/100n/10V/X5R  [C0402-SMALLER]  82.8,9.25 180 bottom
D1  MMSZ5231BT1G  [SOD123]  98.8,25.5 90 bottom
D2  LXES15AAA1-153  [R0402-SMALLER]  116.3,33.75 270 bottom
FID1  FIDUCIAL1X2.5-STOP  [FIDUCIAL-1X2.5-STOP]  47.8,2.5 270 top
FID2  FIDUCIAL1X2.5-STOP  [FIDUCIAL-1X2.5-STOP]  -2.2,28 180 bottom
FID3  FIDUCIAL1X2.5-STOP  [FIDUCIAL-1X2.5-STOP]  59.8,80 180 top
FID4  FIDUCIAL1X2.5-STOP  [FIDUCIAL-1X2.5-STOP]  59.8,80 180 bottom
FID5  FIDUCIAL1X2.5-STOP  [FIDUCIAL-1X2.5-STOP]  -2.2,28 180 top
FID6  FIDUCIAL1X2.5-STOP  [FIDUCIAL-1X2.5-STOP]  47.8,2.5 270 bottom
FL1  DEA202450BT-1294C1-H  [DEA202450BT]  10.8,25.75 270 bottom
IC1  MSP432E401  [QFP128-0.4]  59.8,53 0 bottom
IC2  AS4C4M16SA-7TCN  [TSOP54-400]  38,52.7 270 bottom
IC3  TPS62822DLCR  [VSON-HR]  31.5,14.1 180 bottom
IC4  TCA9555RGER  [QFN-24]  78.05,26 270 bottom
IC5  SIM800C  [SIM800C]  100.3,41 180 bottom
IC6  SST26VF016B-104I/SM  [SO08-EIAJ]  72.5,43.15 270 bottom
IC7  TPD3E001DRL  [DRL-5]  69.8,69.25 180 bottom
IC8  BQ25601  [QFN-24]  41.05,24 270 bottom
IC9  OPT3001  [USON-6]  82.8,10.2 90 top
IC10  TPD3E001DRL  [DRL-5]  113.3,30.75 0 bottom
IC11  LMV358ID  [SO08]  79.8,54 180 bottom
IC12  SN74HC4066D  [SO14]  90.8,54.5 0 bottom
IC13  TPA2006D1  [VSON-8]  25.55,49 90 bottom
IC14  MX25R1635FM1IL0  [SO08-EIAJ]  12.05,40.25 90 bottom
IC15  CC3120R  [VQFN-64]  17.3,22.5 0 bottom
J1  78723-1001  [MSIM-MOLEX-LWK]  117.3,22.25 180 bottom
J2  ER-CON50HT-1  [FH12-50S-0.5SH]  59.8,33.5 0 bottom
J3  2x5 1.27mm  [PINHEAD_2X05_127]  89.7,62.2 0 bottom
J4  GSM-COIL-ANT  [GSM-ANTENNA]  116.3,36 0 bottom
J5  S2B-PH-SM4-TB(LF)(SN)  [JST-2-SMD]  88.6,15.8 90 bottom
JP2  1x03  [1X03_LOCK]  57.26,75.4 180 bottom
JP3  1x02 2MM  [1X02_2MM]  41.55,8.25 0 bottom
JP4  TC2030-MCP-NL  [TC2030-MCP-NL]  84.25,63.9 270 bottom
JP7  1x14  [1X14_LOCK]  2.05,59.5 270 bottom
JP8  1x04_1.27MM  [1X04-1.27MM]  10.55,14 180 top
JP9  1x04_1.27MM  [1X04-1.27MM]  113.3,49.5 0 bottom
L1  SRN2512-2R2M  [1008]  36.05,19.75 270 bottom
L2  BLM18KG121TN1D  [WUERTH-0805]  67.55,69.5 270 bottom
L3  0402/0R/5%  [L0402]  113.8,34.25 180 bottom
L4  DFE201610E-R47M=P2  [0806]  35.3,15.15 90 bottom
L5  0402/0R/5%  [L0402]  110.55,64 110 bottom
L6  0402/0R/5%  [L0402]  3.8,23 0 bottom
L7  LQM2HPN2R2MG0L  [1008]  14.3,33.2 180 bottom
L8  LQM2HPN1R0MG0L  [1008]  17.3,33.5 270 bottom
L9  LQM2HPN2R2MG0L  [1008]  23.8,32 270 bottom
LAYERS1  LAYER_NUMBRS_4_SMALL  [LAYER_NUMBERS_4_SMALL]  57.8,23.5 0 top
LCD  ER-TFT024-3  [ER-TFT024-3]  59.8,33.5 0 top
LED1  WS2812B  [WS2812B]  52.3,74 180 top
LED2  WS2812B  [WS2812B]  67.3,74 180 top
LED3  0603 RED  [LED-0603-CORRECT]  61.07,72 90 top
LED4  0603 GREEN  [LED-0603-CORRECT]  58.53,72 90 top
LED5  LED 5MM  [LED5MM]  33.8,10 0 top
LED6  0603 RED  [LED-0603-CORRECT]  43.55,28.75 180 bottom
LOGO1  EMFLOGO-BOTH  [EMFLOGO]  32.3,26 180 top
PCB  TiLDA Mk4 PCB  [TILDA_MK4_OUTLINE]  59.8,0 0 top
Q1  2N7002PW  [SC70-3-R]  90.3,29.5 90 bottom
Q2  2N7002PW  [SC70-3-R]  100.55,14 180 bottom
Q3  CSD25402Q3A  [Q3A]  39.55,15.75 0 bottom
Q8  CSD13202Q2  [Q2]  74.3,38.75 270 bottom
R1  0402/1K/5%  [R0402-SMALLER]  4.3,53 180 bottom
R2  0402/1K/5%  [R0402-SMALLER]  4.55,48 180 bottom
R3  0402/4K87/5%  [R0402-SMALLER]  49.8,57.25 0 bottom
R4  0402/10K/5%  [R0402-SMALLER]  58.3,65.25 180 bottom
R5  0402/1M/5%  [R0402-SMALLER]  49.8,59.25 0 bottom
R6  0402/2K/5%  [R0402-SMALLER]  63.55,63.75 90 bottom
R7  0402/1M/5%  [R0402-SMALLER]  65.3,72 270 bottom
R8  0402/100R/5%  [R0402-SMALLER]  70.8,67.25 270 bottom
R9  0402/10K/5%  [R0402-SMALLER]  67.3,44.25 270 bottom
R10  0402/10K/5%  [R0402-SMALLER]  77.8,41.75 90 bottom
R11  [0309/10]  23.3,12.25 180 top
R12  0402/2K/5%  [R0402-SMALLER]  61.07,72 270 bottom
R13  0402/10K/5%  [R0402-SMALLER]  37.55,15.25 90 bottom
R14  0402/4K7/5%  [R0402-SMALLER]  58.53,72 270 bottom
R15  0402/10K/5%  [R0402-SMALLER]  45.55,23.25 0 bottom
R16  0402/10K/5%  [R0402-SMALLER]  45.55,22.25 180 bottom
R17  0402/2K/5%  [R0402-SMALLER]  45.55,24.25 180 bottom
R18  0402/10K/5%  [R0402-SMALLER]  41.05,30.5 180 bottom
R19  0402/10K/5%  [R0402-SMALLER]  41.05,29.5 180 bottom
R20  0402/10K/5%  [R0402-SMALLER]  41.55,28 90 bottom
R21  0402/4K7/5%  [R0402-SMALLER]  45.85,48.25 90 bottom
R22  0402/4K7/5%  [R0402-SMALLER]  46.85,48.25 90 bottom
R23  0402/4K7/5%  [R0402-SMALLER]  99.05,11.75 90 bottom
R24  0402/4K7/5%  [R0402-SMALLER]  98.05,11.75 90 bottom
R25  0402/100K/5%  [R0402-SMALLER]  24.8,16.75 180 bottom
R26  0402/51R/5%  [R0402-SMALLER]  97.3,52.5 90 bottom
R27  0402/51R/5%  [R0402-SMALLER]  99.3,52.5 90 bottom
R28  0402/51R/5%  [R0402-SMALLER]  100.3,52.5 90 bottom
R29  0402/4K7/5%  [R0402-SMALLER]  97.8,30.5 0 bottom
R30  0402/100K/5%  [R0402-SMALLER]  88.3,29.5 90 bottom
R31  0402/1K/5%  [R0402-SMALLER]  89.8,41.25 180 bottom
R32  0402/1K/5%  [R0402-SMALLER]  89.8,42.25 180 bottom
R33  0402/1K/5%  [R0402-SMALLER]  89.8,39.25 180 bottom
R34  0402/1K/5%  [R0402-SMALLER]  89.8,38.25 180 bottom
R35  0402/1K/5%  [R0402-SMALLER]  89.8,37.25 180 bottom
R36  0402/1K/5%  [R0402-SMALLER]  89.8,33.25 180 bottom
R37  0402/1K/5%  [R0402-SMALLER]  89.8,35.25 180 bottom
R38  0402/5K6/5%  [R0402-SMALLER]  89.8,34.25 0 bottom
R39  0402/5K6/5%  [R0402-SMALLER]  89.8,36.25 0 bottom
R40  0402/5K6/5%  [R0402-SMALLER]  89.8,40.25 0 bottom
R41  0402/1K/5%  [R0402-SMALLER]  89.8,32.25 180 bottom
R42  0402/1K/5%  [R0402-SMALLER]  89.8,31.25 180 bottom
R43  0402/10K/5%  [R0402-SMALLER]  80.55,47 90 bottom
R44  0402/12R/5%  [R0402-SMALLER]  69.3,39 270 bottom
R45  0402/10K/5%  [R0402-SMALLER]  81.55,47 90 bottom
R46  0402/10K/5%  [R0402-SMALLER]  82.05,49.5 180 bottom
R47  0402/12R/5%  [R0402-SMALLER]  72.3,39 270 bottom
R48  0402/12R/5%  [R0402-SMALLER]  71.3,39 270 bottom
R49  0402/12R/5%  [R0402-SMALLER]  70.3,39 270 bottom
R50  0402/22K/5%  [R0402-SMALLER]  80.05,49.5 0 bottom
R51  0402/22K/5%  [R0402-SMALLER]  80.05,48.5 0 bottom
R52  0402/14K7/5%  [R0402-SMALLER]  79.8,59.75 180 bottom
R53  0402/7K87/5%  [R0402-SMALLER]  76.8,58.75 0 bottom
R54  0402/10K/5%  [R0402-SMALLER]  85.3,54.5 270 bottom
R55  0402/10K/5%  [R0402-SMALLER]  87.55,49.75 180 bottom
R56  0402/10K/5%  [R0402-SMALLER]  94.05,59.5 180 bottom
R57  0402/150K/1%  [R0402-SMALLER]  25.55,45.75 90 bottom
R58  0402/150K/1%  [R0402-SMALLER]  24.55,45.75 90 bottom
R59  0402/10K/5%  [R0402-SMALLER]  100.55,16 180 bottom
R60  0402/732K/5%  [R0402-SMALLER]  28.75,14.35 270 bottom
R61  0402/162K/5%  [R0402-SMALLER]  29.75,14.35 90 bottom
R62  0402/10K/5%  [R0402-SMALLER]  11.8,16.75 270 bottom
R63  0402/100K/5%  [R0402-SMALLER]  7.8,34.2 90 bottom
R64  0402/100K/5%  [R0402-SMALLER]  8.8,34.2 90 bottom
R65  0402/100K/5%  [R0402-SMALLER]  12.8,16.75 270 bottom
R66  0402/10K/5%  [R0402-SMALLER]  17.3,37.75 90 bottom
R67  0402/100K/5%  [R0402-SMALLER]  9.3,37.25 180 bottom
R68  0402/100K/5%  [R0402-SMALLER]  24.8,19.75 180 bottom
R69  0402/100K/5%  [R0402-SMALLER]  24.8,17.75 180 bottom
R70  0402/100K/5%  [R0402-SMALLER]  26.55,26.5 90 bottom
R71  0402/100K/5%  [R0402-SMALLER]  18.3,16.25 270 bottom
R72  0402/100K/5%  [R0402-SMALLER]  13.8,15 270 bottom
R73  0402/100K/5%  [R0402-SMALLER]  9.05,29 90 bottom
S1  SKPMAPE010  [SKPMAPE010-COMBINED]  87.8,53.5 0 top
S2  SKPMAPE010  [SKPMAPE010-COMBINED]  100.3,53.5 0 top
S3  SKPMAPE010  [SKPMAPE010-COMBINED]  112.8,53.5 0 top
S4  SKPMAPE010  [SKPMAPE010-COMBINED]  87.8,41 0 top
S5  SKPMAPE010  [SKPMAPE010-COMBINED]  100.3,41 0 top
S6  SKPMAPE010  [SKPMAPE010-COMBINED]  112.8,41 0 top
S7  SKPMAPE010  [SKPMAPE010-COMBINED]  87.8,28.5 0 top
S8  SKPMAPE010  [SKPMAPE010-COMBINED]  100.3,28.5 0 top
S9  SKPMAPE010  [SKPMAPE010-COMBINED]  112.8,28.5 0 top
S10  SKPMAPE010  [SKPMAPE010-COMBINED]  87.8,16 0 top
S11  SKPMAPE010  [SKPMAPE010-COMBINED]  100.3,16 0 top
S12  SKPMAPE010  [SKPMAPE010-COMBINED]  112.8,16 0 top
S13  SKPMAPE010  [SKPMAPE010-COMBINED]  10.6,48 135 top
S14  SKPMAPE010  [SKPMAPE010-COMBINED]  20.6,53 180 top
S15  SKPMAPE010  [SKPMAPE010-COMBINED]  30.6,48 45 top
S16  3X6X2.5  [TACTILE_SWITCH_SMD_3X6X2.5H]  29.8,68 15 top
S17  3X6X2.5  [TACTILE_SWITCH_SMD_3X6X2.5H]  89.8,68 345 top
S18  CUS-12TB  [SWITCH-SPST-SMD-A]  59.8,7.1 180 bottom
S19  3X6X2.5  [TACTILE_SWITCH_SMD_3X6X2.5H]  71.8,8.25 180 bottom
S20  3X6X2.5  [TACTILE_SWITCH_SMD_3X6X2.5H]  47.8,8.25 180 bottom
S22  AYZ0202AGRLC  [AYZ-JS-COMBINED]  99.8,67 287 bottom
SJ1  Amp Power Select  [SJ_3]  28.8,62 180 bottom
SW1  JOYSTICK  [JOYSTICK_MULTICOMP_NOSILK]  20.6,39 315 top
TP1  TP  [B1,27]  52.2,60.7 0 bottom
TP2  TP  [B1,27]  87.8,41.5 0 bottom
TP3  TP  [B1,27]  87.3,39.75 0 bottom
TP4  TP  [B1,27]  86.05,38.5 0 bottom
TP5  TP  [B1,27]  87.55,37.25 0 bottom
TP6  TP  [B1,27]  72.3,65.5 0 bottom
TP7  TP  [B1,27]  67.55,65.5 0 bottom
U1  ZX62-B-5PA(33)  [USB-AB-MICRO-SMD_LWK]  70.2,75.5 274 bottom
U2  TMP102  [SOT563]  74.8,21 270 bottom
U4  MIC-4MM  [MIC-SMD-4MM]  105.8,59 90 bottom
U5  LDMS1540S-01-R8-0.8-R  [SPEAKER-15MM-SMD]  15.8,53 90 bottom
X1  ABS07-32.768KHZ-T  [RESONATOR_EPSON_FC_145]  54.2,64.75 180 bottom
X2  ABM8G-25.000MHZ-B4Y-T  [CRYSTAL-3.2-2.5]  63.05,67.75 90 bottom
X3  ABS07-32.768KHZ-T  [RESONATOR_EPSON_FC_145]  25.8,22.75 90 bottom
X4  ABM8-40.000MHZ-10-1-U-T  [CRYSTAL-3.2-2.5]  8.6,19.25 270 bottom

## Library data of the parts
ANT1 ANT2 BATT C1-C31 C33-C71 C78 C79 C81-C104 D1 D2 FL1 IC1-IC15 J1 J2 J4 J5 L1-L9 LCD LED1 LED2 LOGO1 PCB Q1-Q3 Q8 R1-R10 R12-R73 S1-S19 S22 SW1 U1 U2 U4 U5 X1-X4 = TiLDA Mk4 Parts
ARTWORK1 ARTWORK2 C32 C72-C77 C80 FID1-FID6 J3 JP2-JP4 JP7-JP9 LAYERS1 LED5 R11 S20 SJ1 = TiLDA Mk4 Parts; DNP: Y
LED3 LED6 = TiLDA Mk4 Parts; COLOUR: RED
LED4 = TiLDA Mk4 Parts; COLOUR: GREEN
TP1 = TiLDA Mk4 Parts; TP_SIGNAL_NAME: !HIB
TP2 = TiLDA Mk4 Parts; TP_SIGNAL_NAME: SIM_DTR
TP3 = TiLDA Mk4 Parts; TP_SIGNAL_NAME: SIM_DCD
TP4 = TiLDA Mk4 Parts; TP_SIGNAL_NAME: SIM_CTS
TP5 = TiLDA Mk4 Parts; TP_SIGNAL_NAME: SIM_RTS
TP6 = TiLDA Mk4 Parts; TP_SIGNAL_NAME: USB_ID
TP7 = TiLDA Mk4 Parts; TP_SIGNAL_NAME: USB_VBUS

## Nets
3V3: C2.2 C3.2 C4.2 C9.2 C10.2 C11.2 C12.2 C13.2 C14.2 C21.2 C22.2 C23.2 C24.2 C25.2 C26.2 C27.2 C28.2 C33.1 C38.2 C42.2 C43.2 C45.2 C47.1 C59.2 C70.2 C71.2 C88.1 C89.1 C90.1 C91.1 C92.1 C93.1 C102.1 C103.1 C104.1 IC1.7 IC1.8 IC1.9 IC1.16 IC1.26 IC1.28 IC1.39 IC1.47 IC1.51 IC1.52 IC1.68 IC1.69 IC1.79 IC1.90 IC1.101 IC1.113 IC1.122 IC2.1 IC2.3 IC2.9 IC2.14 IC2.27 IC2.43 IC2.49 IC4.21 IC6.8 IC9.1 IC11.8 IC12.14 IC14.8 IC15.10 IC15.37 IC15.39 IC15.44 IC15.47 IC15.54 J2.1 J2.7 J2.8 J2.9 J2.35 J2.40 J2.41 J2.42 J3.1 JP4.1 JP7.8 JP7.12 L4.2 PCB.3V3 R4.2 R5.2 R9.1 R10.1 R11.2 R21.2 R22.2 R23.2 R24.2 R50.2 R56.2 R60.1 R66.1 R67.2 R68.2 R69.2 R73.2 SJ1.1 SW1.COM U2.5
3V3_POE: C5.2 JP7.14
!HIB: IC1.65 TP1.TP
!RESET: C15.2 IC1.70 J3.10 R4.1 S19.2
!WAKE: IC1.64 R5.1 S20.2
AIN0_ADC_X: IC1.13 J2.46
AIN1_ADC_Y: IC1.12 J2.47
AIN4_SPK_ADC: IC1.128 IC11.7 R46.2
AIN5_CH3: IC1.127 PCB.CH2
AMP_IN_N [Audio]: IC13.4 R58.2
AMP_IN_P [Audio]: IC13.3 R57.2
AMP_IN_R_N [Audio]: C82.1 R58.1
AMP_IN_R_P [Audio]: C83.1 R57.1
AMP_VDD: C58.1 IC13.1 IC13.6 SJ1.2
BQ_!CE: IC8.9 R17.1
BQ_!INT: IC1.14 IC8.7
BQ_!PG: IC8.3
BQ_!QON: IC8.12 JP3.2
BQ_PMID: C36.1 IC8.23
BQ_PSEL: IC8.2 R18.1 R19.1
BQ_REGN: C39.2 IC8.22 R16.2
BQ_STAT: IC8.4 R20.1
BQ_STAT_R: LED6.C R20.2
BQ_SW: C37.2 IC8.19 IC8.20 L1.1
BQ_TS: IC8.11 R15.2 R16.1
BT_ANT [50R Single]: C74.2 IC5.20 L5.1
BT_ANT_L [50R Single]: ANT2.1 C75.2 L5.2
BTN_1: IC4.1 S1.2 S1.B1 S1.B2
BTN_2: IC4.3 S2.2 S2.B1 S2.B2
BTN_3: IC4.4 S3.2 S3.B1 S3.B2
BTN_4: IC4.7 S4.2 S4.B1 S4.B2
BTN_5: IC4.6 S5.2 S5.B1 S5.B2
BTN_6: IC4.5 S6.2 S6.B1 S6.B2
BTN_7: IC4.8 S7.2 S7.B1 S7.B2
BTN_8: IC4.10 S8.2 S8.B1 S8.B2
BTN_9: IC4.11 S9.2 S9.B1 S9.B2
BTN_10: IC4.14 S10.2 S10.B1 S10.B2
BTN_11: IC4.13 S11.2 S11.B1 S11.B2
BTN_12: IC4.12 S12.2 S12.B1 S12.B2
BTN_A: IC4.16 S13.2 S13.B1 S13.B2
BTN_B: IC4.17 S15.2 S15.B1 S15.B2
BTN_CALL: IC4.15 S16.2
BTN_END: IC4.2 S17.2
BTN_MENU: IC1.60 S14.2 S14.B1 S14.B2
BTST: C37.1 IC8.21
CC_!CTS: IC15.61
CC_!HIB: IC1.124 IC15.2 R25.1
CC_!RESET: C60.2 IC1.118 IC15.32 R73.1
CC_!RTS: IC15.50 R70.1
CC_IRQ: IC1.123 IC15.15 R72.1
CC_RCT_XTAL_N: C100.2 IC15.52 X3.P$1
CC_RESERVED@19: IC15.19 R65.1
CC_RTC_XTAL_P: C101.2 IC15.51 X3.P$2
CC_WLAN_XTAL_: C99.2 IC15.22 X4.3
CC_WLAN_XTAL_P: C98.2 IC15.23 X4.1
CH4: IC1.126 PCB.CH1
DCDC_ANA2_SW_N: IC15.46
DCDC_ANA2_SW_P: IC15.45
DCDC_ANA_SW: IC15.38 L7.2
DCDC_DIG_SW: IC15.43 L9.2
DCDC_PA_SW_N: IC15.41 L8.1
DCDC_PA_SW_P: IC15.40 L8.2
EN0RXI_N [100R Diff]: IC1.53 JP7.13
EN0RXI_P [100R Diff]: IC1.54 JP7.11
EN0TXO_N [100R Diff]: IC1.56 JP7.7
EN0TXO_P [100R Diff]: IC1.57 JP7.6
ETHLED0: IC1.63 R1.2
ETHLED0_R: JP7.3 R1.1
ETHLED1: IC1.61 R2.2
ETHLED1_R: JP7.5 R2.1
FET: IC1.110 Q2.1 R59.1
FET_OUT: LED5.K PCB.FET Q2.3
FLASH_!CS: IC14.1 IC15.14 JP8.2 R67.1
FLASH_CLK: IC14.6 IC15.11 JP8.3
FLASH_MISO: IC14.2 IC15.13 JP8.1
FLASH_MOSI: IC14.5 IC15.12 JP8.4
FLASH_PU: IC14.3 IC14.7 R66.2
GMS_ANT_L [50R Single]: C73.2 D2.1 J4.ANT L3.2
GND: ANT1.2 ANT1.3 ANT1.4 ANT2.2 ANT2.3 ANT2.4 C1.2 C2.1 C3.1 C4.1 C5.1 C6.1 C7.1 C8.1 C9.1 C10.1 C11.1 C12.1 C13.1 C14.1 C15.1 C16.1 C17.1 C18.1 C19.1 C20.1 C21.1 C22.1 C23.1 C24.1 C25.1 C26.1 C27.1 C28.1 C29.- C30.1 C31.1 C32.- C33.2 C34.2 C35.2 C36.2 C38.1 C39.1 C40.2 C41.2 C42.1 C43.1 C44.2 C45.1 C46.2 C47.2 C48.1 C49.1 C50.1 C51.1 C53.2 C54.2 C55.2 C57.2 C58.2 C59.1 C60.1 C61.2 C62.2 C63.2 C65.2 C66.2 C67.2 C69.2 C70.1 C71.1 C72.1 C73.1 C74.1 C75.1 C76.1 C77.1 C78.1 C84.2 C85.2 C86.2 C87.2 C88.2 C89.2 C90.2 C91.2 C92.2 C93.2 C94.2 C95.2 C96.2 C97.2 C98.1 C99.1 C100.1 C101.1 C102.2 C104.2 D1.A D2.2 FL1.GND@2 FL1.GND@4 IC1.10 IC1.17 IC1.48 IC1.55 IC1.58 IC1.80 IC1.114 IC2.6 IC2.12 IC2.28 IC2.41 IC2.46 IC2.52 IC2.54 IC3.3 IC3.5 IC4.9 IC4.18 IC4.23 IC4.24 IC4.25 IC5.8 IC5.13 IC5.19 IC5.21 IC5.27 IC5.30 IC5.31 IC5.33 IC5.36 IC5.37 IC6.4 IC7.3 IC8.17 IC8.18 IC8.25 IC9.2 IC9.3 IC9.PAD IC10.3 IC11.4 IC12.7 IC13.7 IC13.PAD IC14.4 IC15.PAD J1.C4 J1.C5 J1.GND1 J1.GND2 J1.GND3 J1.GND4 J1.GND5 J1.GND6 J2.6 J2.11 J2.12 J2.13 J2.14 J2.15 J2.16 J2.17 J2.18 J2.19 J2.20 J2.21 J2.22 J2.23 J2.24 J2.25 J2.26 J2.27 J2.28 J2.29 J2.30 J2.31 J2.32 J2.43 J2.48 J2.49 J2.50 J3.3 J3.5 J3.9 J5.1 JP2.1 JP3.1 JP4.5 JP7.1 JP7.2 JP7.4 JP9.1 LED1.3 LED2.3 LED3.C LED4.C PCB.GND Q1.2 Q2.2 Q8.4 Q8.EP2 R3.2 R7.2 R15.1 R17.2 R19.2 R25.2 R30.2 R38.2 R39.2 R40.2 R51.2 R55.1 R59.2 R61.2 R62.2 R63.2 R64.2 R65.2 R70.2 R71.2 R72.2 S1.1 S1.A1 S1.A2 S2.1 S2.A1 S2.A2 S3.1 S3.A1 S3.A2 S4.1 S4.A1 S4.A2 S5.1 S5.A1 S5.A2 S6.1 S6.A1 S6.A2 S7.1 S7.A1 S7.A2 S8.1 S8.A1 S8.A2 S9.1 S9.A1 S9.A2 S10.1 S10.A1 S10.A2 S11.1 S11.A1 S11.A2 S12.1 S12.A1 S12.A2 S13.1 S13.A1 S13.A2 S14.1 S14.A1 S14.A2 S15.1 S15.A1 S15.A2 S16.1 S17.1 S18.2 S19.1 S20.1 U1.GND U2.2 U2.4 X2.2 X2.4 X4.2 X4.4
GSM_ANT [50R Single]: C72.2 IC5.32 L3.1
I2C5_EXT_SCL: IC1.121 PCB.SCL R24.1
I2C5_EXT_SDA: IC1.120 PCB.SDA R23.1
I2C9_SCL: IC1.33 IC4.19 IC8.5 IC9.4 R22.1 U2.1
I2C9_SDA: IC1.34 IC4.20 IC8.6 IC9.6 R21.1 U2.6
JOY_CEN: IC1.72 SW1.CTR
JOY_DOWN: IC1.74 SW1.D
JOY_LEFT: IC1.73 SW1.C
JOY_RIGHT: IC1.91 SW1.B
JOY_UP: IC1.71 SW1.A
LCD_!RST: IC1.111 J2.10
LCD_DCX: IC1.20 J2.36
LCD_TEAR: IC1.21 J2.39
LED1: IC1.86 R12.2
LED1_R: LED3.A R12.1
LED2: IC1.85 R14.2
LED2_R: LED4.A R14.1
LED5_R: LED5.A R11.1
LEDK: Q8.1 Q8.2 Q8.5 Q8.6 Q8.EP1 R44.1 R47.1 R48.1 R49.1
LEDK1: J2.2 R47.2
LEDK2: J2.3 R48.2
LEDK3: J2.4 R49.2
LEDK4: J2.5 R44.2
MIC_MUX_N [Audio]: IC5.10 IC12.9 IC12.11
MIC_MUX_P [Audio]: IC5.9 IC12.1 IC12.3
MIC_N [Audio]: C52.2 C53.1 C55.1 C56.2 S22.6 U4.-
MIC_P [Audio]: C52.1 C54.1 C56.1 C57.1 S22.3 U4.+
MIC_PWM_AMP: C79.1 C80.2 C81.2 IC11.1 IC11.2
MIC_PWM_AMP_+: C78.2 IC11.3 R52.2
MIC_PWM_N [Audio]: C80.1 IC12.8 R54.1
MIC_PWM_P [Audio]: C81.1 IC12.4 R54.2
MIC_PWM_R: C79.2 R52.1 R53.1
MIC_SWITCHED_N [Audio]: IC12.10 S22.5
MIC_SWITCHED_P [Audio]: IC12.2 S22.2
MUX_A: IC1.105 IC12.12 IC12.13 R56.1
MUX_B: IC1.106 IC12.5 IC12.6 R55.2
NETLIGHT_R: IC5.41 R42.2
NRST: JP4.3
OSC0: C16.2 IC1.88 X2.1
OSC1: IC1.89 R6.1
OSC1_R: C17.2 R6.2 X2.3
POWER_SWITCH: Q3.4 R13.1 S18.3
PWM0_LCD_BLIGHT: IC1.42 Q8.3
PWM3_MIC_PWM: IC1.45 R53.2
PWR_KEY_FET: IC5.39 Q1.3
RBIAS+: IC1.59 R3.1
SDRAM_!CAS: IC1.83 IC2.17
SDRAM_!CS: IC1.103 IC2.19
SDRAM_!RAS: IC1.84 IC2.18
SDRAM_!WE: IC1.92 IC2.16
SDRAM_A0: IC1.29 IC2.2 IC2.23
SDRAM_A1: IC1.30 IC2.4 IC2.24
SDRAM_A2: IC1.31 IC2.5 IC2.25
SDRAM_A3: IC1.32 IC2.7 IC2.26
SDRAM_A4: IC1.22 IC2.8 IC2.29
SDRAM_A5: IC1.23 IC2.10 IC2.30
SDRAM_A6: IC1.24 IC2.11 IC2.31
SDRAM_A7: IC1.25 IC2.13 IC2.32
SDRAM_A8: IC1.40 IC2.33 IC2.42
SDRAM_A9: IC1.41 IC2.34 IC2.44
SDRAM_A10: IC1.50 IC2.22 IC2.45
SDRAM_A11: IC1.49 IC2.35 IC2.47
SDRAM_A12: IC1.75 IC2.36 IC2.48
SDRAM_BA0: IC1.76 IC2.20 IC2.50
SDRAM_BA1: IC1.77 IC2.21 IC2.51
SDRAM_CKE: IC1.104 IC2.37
SDRAM_CLK: IC1.62 IC2.38
SDRAM_D15: IC1.78 IC2.53
SDRAM_DQMH: IC1.82 IC2.39
SDRAM_DQML: IC1.81 IC2.15
SIM_CLK: IC10.2 J1.C3 R27.2
SIM_CLK_R: C49.2 IC5.16 R27.1
SIM_CTS: R34.1 TP4.TP
SIM_CTS_R: IC5.4 R34.2
SIM_D_N [90R Diff]: IC5.26 JP9.2
SIM_D_P [90R Diff]: IC5.25 JP9.3
SIM_DATA: IC10.1 J1.C7 R26.2
SIM_DATA_R: C50.2 IC5.15 R26.1
SIM_DCD: R33.1 TP3.TP
SIM_DCD_R: IC5.5 R33.2
SIM_DET: IC5.14 J1.C8 R29.2
SIM_DTR: R31.1 TP2.TP
SIM_DTR_R: IC5.6 R31.2 R40.1
SIM_NETLIGHT: IC1.108 R42.1
SIM_PWR_KEY: IC1.109 Q1.1 R30.1
SIM_RI_R: IC5.7 R32.2
SIM_RST: IC10.4 J1.C2 R28.2
SIM_RST_R: C48.2 IC5.17 R28.1
SIM_RTS: R35.1 TP5.TP
SIM_RTS_R: IC5.3 R35.2 R39.1
SIM_RXD_R: IC5.2 R37.2 R38.1
SIM_STATUS: IC1.107 R41.1
SIM_STATUS_R: IC5.42 R41.2
SIM_TXD_R: IC5.1 R36.2
SIM_VBUS: IC5.24 JP9.4
SIM_VDD: C51.2 IC5.18 IC10.5 J1.C1
SOP0: IC15.35 R64.1
SOP1: IC15.34 R63.1
SOP2: IC15.21 R62.1
SPK_AMP_N [Audio]: IC13.8 U5.-
SPK_AMP_P [Audio]: IC13.5 U5.+
SPK_N [Audio]: C64.2 C65.1 C67.1 C68.2 C82.2 IC5.12 R43.1
SPK_P [Audio]: C64.1 C66.1 C68.1 C69.1 C83.2 IC5.11 R45.1
SPK_R_N: IC11.5 R45.2 R46.1
SPK_R_P: IC11.6 R43.2 R50.1 R51.1
SSI0_LCD_CLK: IC1.35 J2.37
SSI0_LCD_CS: IC1.36 J2.38
SSI0_LCD_MISO: IC1.38 J2.33
SSI0_LCD_MOSI: IC1.37 J2.34
SSI2_CC_!CS: IC1.3 IC15.8
SSI2_CC_CLK: IC1.4 IC15.5
SSI2_CC_MISO: IC1.1 IC15.7 R71.1
SSI2_CC_MOSI: IC1.2 IC15.6
SSI3_CLK: IC1.5 IC6.6
SSI3_DAT0: IC1.11 IC6.5
SSI3_DAT1: IC1.27 IC6.2
SSI3_DAT2: IC1.46 IC6.3 R10.2
SSI3_DAT3: IC1.119 IC6.7 R9.2
SSI3_FSS: IC1.6 IC6.1
SW: IC3.6 L4.1
T3CCPO_WS2812: IC1.125 LED1.4
T_X: IC1.43 J2.44
T_Y: IC1.44 J2.45
TCA_INT: IC1.15 IC4.22
TCK_SWCLK: IC1.100 J3.4 JP4.4
TDI: IC1.98 J3.8
TDO_SWO: IC1.97 J3.6 JP4.6
TMS_SWDIO: IC1.99 J3.2 JP4.2
TPS_FB: C103.2 IC3.2 R60.2 R61.1
UART1_SIM_RI: IC1.112 R32.1
UART1_SIM_RX: IC1.95 R36.1
UART1_SIM_TX: IC1.96 R37.1
UART3_CC_RX: IC1.116 IC15.55 R68.1
UART3_CC_TX: IC1.117 IC15.57 R69.1
UART5_EXT_RX: IC1.18 PCB.CH3
UART5_EXT_TX: IC1.19 PCB.CH4
USB_D_N [90R Diff]: IC1.93 IC7.1 U1.D-
USB_D_P [90R Diff]: IC1.94 IC7.2 U1.D+
USB_ID: R8.2 TP6.TP
USB_ID_R: IC7.4 R8.1 U1.ID
USB_SHIELD: C20.2 R7.1 U1.SHIELD U1.SHIELD@0 U1.SHIELD@1 U1.SHIELD@2 U1.SHIELD@3 U1.SHIELD@5
V_UNREG: C40.1 IC8.15 IC8.16 L1.2 PCB.VBATT Q3.5 Q3.6 Q3.7 Q3.8 Q3.EP R13.2 R18.2
VBAT: C34.1 C35.1 IC8.13 IC8.14 J5.2
VBATT: C1.1 C29.+ C30.2 C31.2 C32.+ C46.1 D1.C IC3.1 IC3.7 IC5.34 IC5.35 JP2.2 LED1.1 LED2.1 Q3.1 Q3.2 Q3.3 SJ1.3
VBUS: C41.1 IC7.5 IC8.1 IC8.24 L2.2 LED6.A TP7.TP
VBUS_L: L2.1 U1.VBUS
VDD_ANA: C44.1 C61.1 C62.1 C63.1 IC15.25 IC15.36 IC15.48 L7.1
VDD_DIG_CC: C87.1 C96.1 C97.1 IC15.9 IC15.56 L9.1
VDD_EXT: IC5.40 R29.1
VDD_PA: C84.1 C85.1 C86.1 IC15.33 IC15.42
VDD_PLL: C94.1 IC15.24
VDD_RAM: C95.1 IC15.49
VDDC: C6.2 C7.2 C8.2 IC1.87 IC1.115
WFIF_ANT_L [50R Single]: ANT1.1 C77.2 L6.2
WIFI_ANT [50R Single]: C76.2 FL1.OUT L6.1
WIFI_ANT_F [50R Single]: FL1.IN IC15.31
WS2812_OUT: JP2.3 LED2.2
WS28212_1: LED1.2 LED2.4
XOSC0: C18.2 IC1.66 X1.P$1
XOSC1: C19.2 IC1.67 X1.P$2

## Tracks (layer width: path | path; a pad name or v marks a point on that pad's centre or on a via)
3V3  (via drill 0.3)
  Top 0.15: IC9.1 82.15,8.6 v82.3,8.45
  Top 0.3: SW1.COM 23.38,36.17 v22.3,37.25
  Bottom 0.15: v74.3,18.75 C102.1 73.55,19.5 73.3,19.75 73.3,20.75 73.55,21 U2.5 | v82.3,8.45 C104.1
  Bottom 0.2: IC1.9 62.8,43.75 C13.2 | IC1.8 63.2,46.4 v63.55,46.75 63.6,46.7 IC1.7 | IC1.16 60,43.8 C12.2 v60.3,42.75 | IC1.47 50.85,52.4 C10.2 | IC1.113 68.35,52.8 C9.2 | IC1.79 59.2,61.85 C11.2 | IC1.69 55.2,59.65 v55.05,59.5 54.8,59.75 IC1.68 | 20.55,27.28 IC15.47 | IC1.90 63.6,59.55 v63.55,59.5 | IC1.51 v50.8,54 51.2,54.4 IC1.52 | IC1.39 v53.3,49.2 | IC1.28 55.2,44.1 55.3,44 v55.55,44 55.8,44 56,44.2 IC1.26 | R9.1 v67.3,45.5 | IC1.101 66.45,57.6 v66.3,57.75 | IC1.122 66.35,49.2 v66.3,49.25
  Bottom 0.25: J2.41 52.05,38 | J2.40 52.55,37.5 52.05,38 | J2.42 51.55,37.5 52.05,38 | J2.35 v55.05,35.5 | J2.1 v72.05,35.5 | J2.8 v68.55,38 | J2.7 69.05,37.5 v68.55,38 | J2.9 68.05,37.5 v68.55,38 | C13.2 63.05,42.12 C14.2 63.3,41.62 v63.3,40.75 | v49.8,52.1 C10.2 | v70.05,53.75 C9.2 | v58.8,63 C11.2 | R4.2 v58.8,66 | R5.2 v48.55,59.25 | C89.1 19.55,28.5 19.05,28 IC15.44 | IC15.39 16.55,29.55 C90.1 | IC15.37 15.55,29.35 C88.1 | C91.1 v15.8,16.25 16.55,17 IC15.10 | C92.1 v23.8,23.5 23.55,23.75 IC15.54 | IC4.21 C21.2
  Bottom 0.3: 21.02,27.75 20.55,27.28 | R73.2 v9.05,30.25 | JP4.1 85.43,62.63 v85.8,63 | IC12.14 94.61,59.44 R56.2 94.55,60.25 C71.2 v94.8,61.5 | IC6.8 69.15,46.15 C2.2 v69.05,47 | v46.85,49.5 R22.2 R21.2 | C70.2 77.8,49.25 | 77.8,49.25 v77.8,48.75 | IC11.8 77.89,49.34 77.8,49.25 | R10.1 v77.8,40.5 | C28.2 43.73,42.25 IC2.27 43.63,42.25 v42.55,42.25 | v33.55,54.25 33.5,54.3 IC2.43 31.1,54.3 C24.2 | v33.55,59 33.45,59.1 IC2.49 31.15,59.1 C27.2 | v42.55,61.5 IC2.3 C22.2 | v42.55,63.25 42.7,63.1 IC2.1 44.95,63.1 C26.2 | v42.55,56.75 42.6,56.7 IC2.9 45,56.7 C23.2 | v42.55,52.75 42.6,52.7 IC2.14 45,52.7 C25.2 | R23.2 v99.05,13 | R24.2 v98.05,13 | C42.2 v25.8,34.5 | C42.2 26.55,35 v26.55,34.5 | C42.2 25.05,35 v25.05,34.5 | v78.8,49.5 R50.2 | C103.1 R60.1 | C88.1 v14.65,29.5
  Bottom 0.4: 21.02,27.75 22.4,27.75 C93.1 23.4,29.6 v23.8,30 | v21.05,29.75 21.05,29.25 20.5,28.7 C89.1 20.3,28.7 v20.3,29.75 | C90.1 16.9,29.7 v17.45,30.25 | v26.05,19.75 R68.2 | v26.05,17.75 R69.2 | R66.1 v16.55,37.25 C59.2 15.8,37.95 IC14.8 | R67.2 v10.55,37.25 | v74.3,26.5 C21.2 | v28.75,15.6 R60.1 | C43.2 v20.55,13 | C43.2 21.05,13.75 v20.55,13.75 | C43.2 21.05,12.25 v20.55,12.25
  Bottom 0.5: 28.8,62 SJ1.1 v26.8,62 | JP7.12 2.49,31.56 C4.2 | JP7.8 3.4,40.5 C3.2
  other vias: 52.3,41.25 32.95,20.15 33.75,20.15 33.35,20.65
  pour 3V3@2 (isolate 0.254, rank 6): 0,60 0,9 arc31 31.8,0 34.5,0 arc90 37.3,2.8 arc-90 39.3,4.8 80.3,4.8 arc-90 82.3,2.8 arc90 85.1,0 87.8,0 arc31 119.6,9 119.6,60 arc64 113.05,67.75 arc24 59.8,78 arc24 6.55,67.75 arc55
  pour Bottom (no thermals): 52.05,40 52.05,41.3 52.25,41.5 52.6,41.5 52.8,41.3 52.8,39.75 52.3,39.25 52.3,37.75 51.8,37.75 51.8,39.75
  pour Bottom (no thermals): 36.1,15.65 34.55,15.65 34,16.2 32.65,16.2 32.65,20.4 33.15,20.9 33.65,20.9 34.1,20.45 34.1,17.4 34.6,16.9 35.6,16.9 36.1,16.4
  pour Top: 22.3,33 15.8,33 14.3,31.5 14.3,27.5 14.8,27 21.3,27 25.8,31.5 25.8,32.5 27.3,34 27.3,34.5 26.8,35 24.3,35
3V3_POE
  Bottom 0.5: JP7.14 3.45,27.75 C5.2
!HIB
  Bottom 0.2: IC1.65 53.6,61.45 53.3,61.75 52.8,61.75 52.2,61.15 TP1.TP
!RESET  (via drill 0.3)
  Top 0.15: v68.3,25.5 71.6,28.8 74.6,28.8 75.8,30 75.8,30.7 76.5,31.4 76.5,42.4 80.92,46.83 82.66,46.83 83.2,47.37 83.2,47.78 82.58,48.4 80.8,48.4 77.6,51.6 v77.6,54.2 | v76.35,57.7 76.35,62.3 v79.4,65.35 76.47,68.28 72.2,68.28 71.72,67.8 69.94,67.8 69.47,68.28 69.03,68.28 68.56,67.8 59.6,67.8 v58.05,66.25
  Bottom 0.15: IC1.70 55.6,61.8 56.2,62.4 56.9,62.4 56.9,62.5 57.8,63.4 C15.2 | R4.1 57.8,66 v58.05,66.25 | S19.2 78.05,8.25 79.75,9.95 79.75,12.05 78.8,13 74.3,13 68.3,19 v68.3,25.5 | v77.6,54.2 76.35,55.45 v76.35,57.7
  Bottom 0.2: C15.2 R4.1 | J3.10 87.16,65.14 86.8,65.5 79.55,65.5 v79.4,65.35
!WAKE  (via drill 0.3)
  Top 0.15: v69.3,25.5 72.3,28.5 74.8,28.5 76.1,29.8 76.1,30.5 76.8,31.2 76.8,42.25 81.07,46.52 82.78,46.52 83.5,47.24 83.5,47.9 82.7,48.7 81,48.7 78.4,51.3 v78.4,54.2 | v77.1,57.7 77.1,61.9 80,64.8 80,65.8 77.2,68.6 72.1,68.6 | 72.1,68.6 68.93,68.6 68.67,68.33 | 72.1,68.6 71.6,68.1 70.07,68.1 69.59,68.58 68.91,68.58 68.43,68.1 53.2,68.1 v52.8,68.5
  Bottom 0.15: R5.1 50.3,59.75 50.05,60 48.8,60 48.3,60.5 48.3,63.06 48.32,63.08 48.32,63.52 47.87,63.98 47.58,63.98 47.56,64 47.3,64 46.8,64.5 46.8,65 47.8,66 50.3,66 v52.8,68.5 | S20.2 52.05,8.25 53.3,7 57.09,7 57.92,6.17 61.68,6.17 62.51,7 77.3,7 80.05,9.75 80.05,12.25 78.8,13.5 74.55,13.5 68.8,19.25 68.8,25 v69.3,25.5 | v78.4,54.2 77.1,55.5 v77.1,57.7
  Bottom 0.2: IC1.64 50.35,59.2 R5.1
AIN0_ADC_X  (via drill 0.3)
  Top 0.15: v48.9,39.1 50.5,37.5 54.9,37.5 56.67,39.27 56.67,40.42 57,40.74 v57,41
  Bottom 0.15: IC1.13 61.2,43.4 60.82,43.02 60.82,42.53 60.5,42.21 60.5,40.8 60.7,40.6 60.7,39.6 60.2,39.1 58.3,39.1 57.9,39.5 57.9,40.7 57.6,41 v57,41 | v48.9,39.1 49.57,38.42 49.57,37.78 49.55,37.76 J2.46
AIN1_ADC_Y  (via drill 0.3)
  Top 0.15: v49.05,38 49.85,37.2 55.1,37.2 57.2,39.3 v57.2,40.2
  Bottom 0.15: J2.47 v49.05,38 | IC1.12 61.6,43.97 61.52,43.89 61.52,43.23 61.12,42.83 61.12,42.41 60.8,42.08 60.8,41 61.1,40.7 61.1,39.5 60.4,38.8 57.7,38.8 57.2,39.3 v57.2,40.2
AIN4_SPK_ADC  (via drill 0.3)
  Top 0.15: v75.5,53.4 76.1,53.4 76.6,52.9 76.6,51.6 74.1,49.1 70.5,49.1 70.4,49.2 69.7,49.2 69.4,48.9 69.4,48.4 69.8,48 v70.6,48
  Bottom 0.15: R46.2 82.55,52.25 81.8,53 79.55,53 79.16,52.62 | IC11.7 79.16,52.62 | 79.16,52.62 79.16,52.63 78.4,53.4 v75.5,53.4 | IC1.128 68.3,46.8 68.5,47 68.5,47.2 69.3,48 v70.6,48
AIN5_CH3  (via drill 0.3)
  Top 0.15: PCB.CH2 22,8.4 23.4,9.8 25.4,9.8 27.2,11.6 27.2,13.68 28.2,14.68 28.2,16.25 29.1,17.15 29.1,20 32.1,23 32.1,27.75 36.45,32.1 44.3,32.1 45.5,30.9 60.3,30.9 62.6,33.2 62.6,36.7 64.42,38.52 64.42,41.22 64.4,41.24 64.4,41.5 63.7,42.2 63.7,45.73 64.38,46.41 64.38,46.77 v64.8,47.2
  Bottom 0.15: IC1.127 66.5,47.2 65.9,46.6 65.1,46.6 64.8,46.9 v64.8,47.2
AMP_IN_N
  Bottom 0.2: R58.2 24.57,46.27 IC13.4
AMP_IN_P
  Bottom 0.2: R57.2 25.22,46.58 IC13.3
AMP_IN_R_N
  Bottom 0.2: R58.1 C82.1
AMP_IN_R_P
  Bottom 0.2: R57.1 C83.1
AMP_VDD  (via drill 0.3)
  Top 0.22: v25.3,52 25.59,51.71 26.31,51.71 26.66,51.36 26.66,48.77 24.29,46.4 24.29,46.02 25.44,44.88 25.65,44.88 26.03,45.25 v26.55,45.25
  3V3@2 0.5: v28.8,60.75 26.3,58.25 26.3,55.5 25.3,54.5 v25.3,52
  Bottom 0.25: IC13.1 26.52,45.27 v26.55,45.25 | IC13.6 25.22,51.92 v25.3,52 C58.1
  Bottom 0.5: SJ1.2 v28.8,60.75
BQ_!CE
  Bottom 0.15: R17.1 IC8.9
BQ_!INT  (via drill 0.3)
  Top 0.15: v52.7,34.5 53.3,33.9 55.98,33.9 59.6,37.52 59.6,38.82 60.1,39.32 60.1,40.2 58,42.3 58,43.9 60.17,46.08 60.42,46.08 60.8,46.46 v60.8,47.2
  Bottom 0.15: IC8.7 43.8,25.25 44.3,25.75 44.3,26.1 44.5,26.3 45.6,26.3 46.5,25.4 51.9,25.4 52.7,26.2 v52.7,34.5 | v60.8,47.2 IC1.14
BQ_!QON  (via drill 0.3)
  Top 0.15: v44.05,22.7 46.35,25 47.05,25 47.55,24.5 47.55,17 45.8,15.25 45.8,13 45.45,12.65 39.55,12.65 v38.05,11.15
  Bottom 0.15: IC8.12 44,22.75 v44.05,22.7 | JP3.2 38.05,9.75 v38.05,11.15
BQ_PMID
  Bottom 0.3: IC8.23 38.22,24.75
  Bottom 0.4: C36.1 37.1,25.04 37.92,25.04 38.22,24.75
BQ_PSEL
  Bottom 0.15: IC8.2 40.3,29.25 R19.1 R18.1
BQ_REGN  (via drill 0.3)
  Top 0.2: v37.8,24.25 37.8,22.75 38.8,21.75 46.3,21.75 v46.8,22.25
  Bottom 0.25: IC8.22 v37.8,24.25
  Bottom 0.3: R16.2 v46.8,22.25
  Bottom 0.4: C39.2 v37.8,24.25
BQ_STAT
  Bottom 0.15: IC8.4 41.3,27.25 R20.1
BQ_STAT_R
  Bottom 0.15: LED6.C 41.8,28.75 R20.2
BQ_SW
  pour Bottom (no thermals): 39.3,23.3 38.1,23.3 37.5,22.7 36.6,22.7 36.3,23 36.3,23.45 35.85,23.45 34.95,22.55 34.95,20.5 37.1,20.5 37.8,21.2 37.8,22 38.5,22.7 39.3,22.7
BQ_TS
  Bottom 0.15: R16.1 R15.2 IC8.11
BT_ANT
  Bottom 0.4: IC5.20 103.6,51 arc-90 106.6,54 107.05,54 arc90 109.05,56 109.05,58.5 arc-21 109.8,62 arc-6 C74.2 arc-6 L5.1
BT_ANT_L
  Bottom 0.4: L5.2 arc-10 C75.2 111.08,65.72 arc85 110.8,66.25 arc15 ANT2.1
BTN_1  (via drill 0.3)
  Top 0.2: S1.B2 93.7,54.4 93.7,47.15 92.81,46.25 83.11,46.25 83.03,46.17 81.38,46.17 79.35,44.15 79.35,36.67 77.12,34.45 77.12,30.9 76.45,30.22 v76.45,28.85
  Top 0.3: S1.2 92.35,55.05 S1.B2 S1.B1
  Bottom 0.15: IC4.1 76.8,28.5 v76.45,28.85
BTN_2  (via drill 0.3)
  Top 0.2: S2.2 103.3,46.5 102.3,45.5 95.28,45.5 95.23,45.55 83.4,45.55 83.32,45.48 81.72,45.48 80.05,43.8 80.05,36.38 77.9,34.23 77.9,30.4 v77.5,30
  Top 0.3: S2.2 104.85,55.05 S2.B2 103.15,55.75 102.55,55.15 101.05,55.15 100.45,55.75 S2.B1
  Bottom 0.15: IC4.3 77.8,29.7 v77.5,30
BTN_3  (via drill 0.3)
  Top 0.2: S3.B1 106.8,54.3 106.8,46.5 105.3,45 95.29,45 95.09,45.2 83.55,45.2 83.47,45.12 81.87,45.12 80.4,43.66 80.4,36.24 78.3,34.14 78.3,30.3 v78.6,30
  Top 0.3: S3.2 117.35,55.05 S3.B2 S3.B1
  Bottom 0.15: IC4.4 78.3,29.7 v78.6,30
BTN_4  (via drill 0.3)
  Top 0.2: S4.B1 82.05,43.25 81.5,42.7 81.5,31.2 81.5,31 81.5,28.3 v81.1,27.9
  Top 0.3: S4.2 92.35,42.55 S4.B2 91.15,43.25 90.55,42.65 89.05,42.65 88.45,43.25 S4.B1
  Bottom 0.15: IC4.7 80.45,27.25 v81.1,27.9
BTN_5  (via drill 0.3)
  Top 0.2: S5.B1 95.75,43.55 94.8,44.5 83.83,44.5 83.76,44.42 82.16,44.42 81.15,43.41 81.15,36 79.1,33.95 79.1,30.77 79.65,30.22 v79.65,28.85
  Top 0.3: S5.2 104.85,42.55 S5.B2 S5.B1
  Bottom 0.15: IC4.6 79.3,28.5 v79.65,28.85
BTN_6  (via drill 0.3)
  Top 0.2: S6.B2 113.08,43.25 113.03,43.3 112.57,43.3 112.52,43.25 S6.B1 107,44.5 95.29,44.5 94.94,44.85 83.69,44.85 83.61,44.77 82.02,44.77 80.8,43.56 80.8,36.15 78.7,34.05 78.7,30.68 79.15,30.23 79.15,29.77 79.1,29.72 v79.1,29.4
  Top 0.3: S6.2 117.35,42.55 S6.B2
  Bottom 0.15: IC4.5 78.8,29.1 v79.1,29.4
BTN_7  (via drill 0.3)
  Top 0.2: v81.43,27.17 83.25,28.99 S7.B1
  Top 0.3: S7.2 92.35,30.05 S7.B2 S7.B1
  Bottom 0.15: IC4.8 80.77,26.75 80.82,26.8 81.06,26.8 v81.43,27.17
BTN_8  (via drill 0.3)
  Top 0.2: S8.2 103.3,23.75 102.25,22.7 94.1,22.7 93.3,21.9 87.5,21.9 86.2,21.9 85.2,21.9 v81.7,25.4
  Top 0.3: S8.2 104.85,30.05 S8.B2 S8.B1
  Bottom 0.15: IC4.10 80.81,25.75 80.83,25.73 81.38,25.73 v81.7,25.4
BTN_9  (via drill 0.3)
  Top 0.2: S9.B2 116.33,30.75 113.78,28.2 112.67,28.2 110.12,30.75 S9.B1 108.25,28.35 106.95,27.05 106.95,24.15 105.1,22.3 94.19,22.3 93.44,21.55 87.6,21.55 85.66,21.55 84.55,21.55 v81.6,24.5
  Top 0.3: S9.2 117.35,30.05 S9.B2
  Bottom 0.15: IC4.11 80.85,25.25 v81.6,24.5
BTN_10  (via drill 0.3)
  Top 0.2: S10.B2 92.35,19.7 91.65,20.4 82.3,20.4 81.3,20.4 | 81.2,20.4 81.3,20.4 | v79.2,22.5 81.3,20.4
  Top 0.3: S10.2 92.35,17.55 S10.B2 S10.B1
  Bottom 0.15: IC4.14 78.8,23.1 79.2,22.7 v79.2,22.5
BTN_11  (via drill 0.3)
  Top 0.2: S11.B2 104.85,20.65 103.9,21.6 94.5,21.6 93.7,20.8 82,20.8 v79.65,23.15
  Top 0.3: S11.2 104.85,17.55 S11.B2 S11.B1 | S11.B1 95.55,18.25 95.3,18 95.5,18 S11.B1
  Bottom 0.15: IC4.13 79.3,23.5 v79.65,23.15
BTN_12  (via drill 0.3)
  Top 0.2: S12.B1 104.55,21.95 94.34,21.95 93.59,21.2 84,21.2 v80.8,24.4
  Top 0.3: S12.2 117.35,17.55 S12.B2 S12.B1
  Bottom 0.15: IC4.12 80.45,24.75 v80.8,24.4
BTN_A  (via drill 0.3)
  Top 0.15: v77.8,22.1 76.9,21.2 70.6,21.2 63.3,28.5 49.9,28.5 v48.8,27.4 | v21,41.4 21,43.8 20.4,44.4 13.43,44.4 S13.B1
  Top 0.3: S13.2 7.98,49.63 S13.B2 S13.B1
  Bottom 0.15: IC4.16 v77.8,22.1 | v48.8,27.4 48.2,27.4 45.7,29.9 44.7,29.9 39.2,35.4 30.62,35.4 28.72,37.3 24.32,37.3 22.72,38.9 21.8,38.9 21,39.7 v21,41.4